# Altium PCB IO_Combo_V1_2PCB.PcbDoc (part 1 of 3)
Units mil, origin at the board's own origin, x right, y up, seen from the top; angles counter-clockwise.
Board outline 5600 x 4000 mil, 4 copper layers (Top Layer, Plane_Gnd, Plane_Power, Bottom Layer), stack 23.756 mil thick; 126 components, 208 nets, 710 pads, 196 vias.
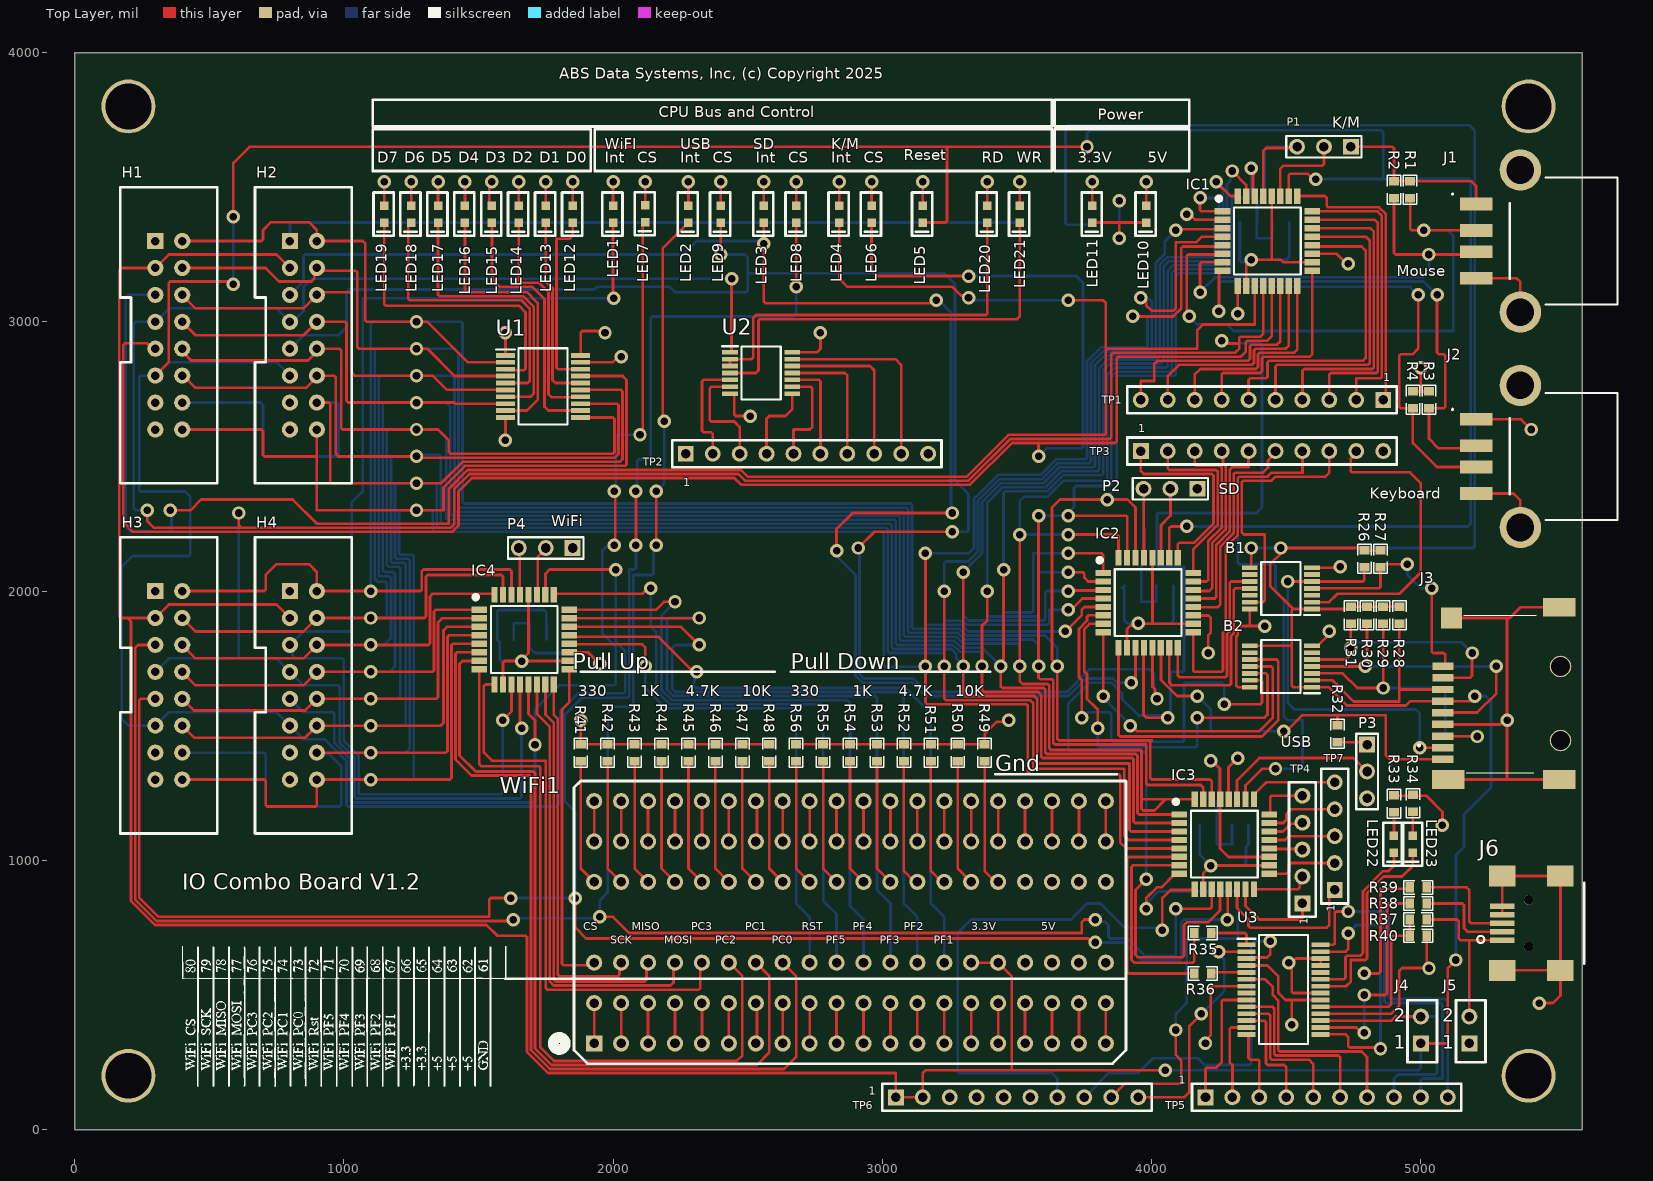
[diagram p0: Top Layer view]
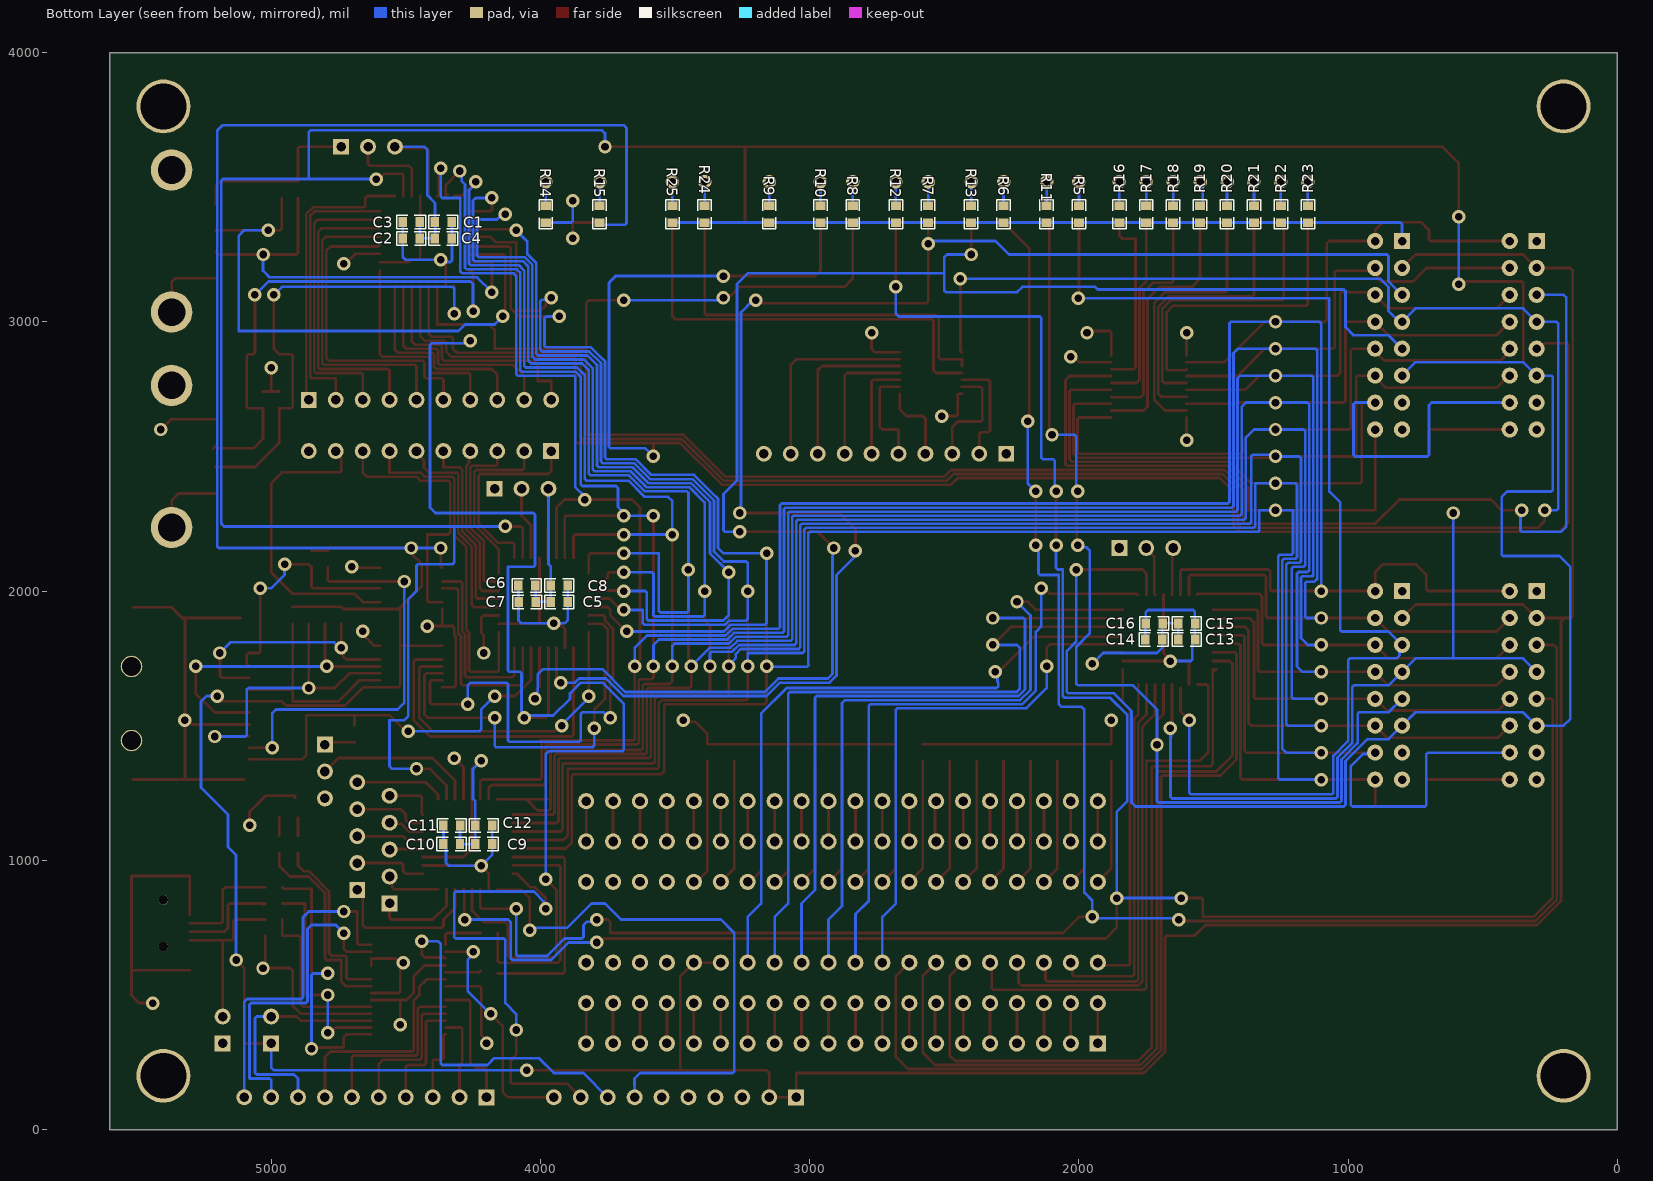
[diagram p1: Bottom Layer view, seen from below]
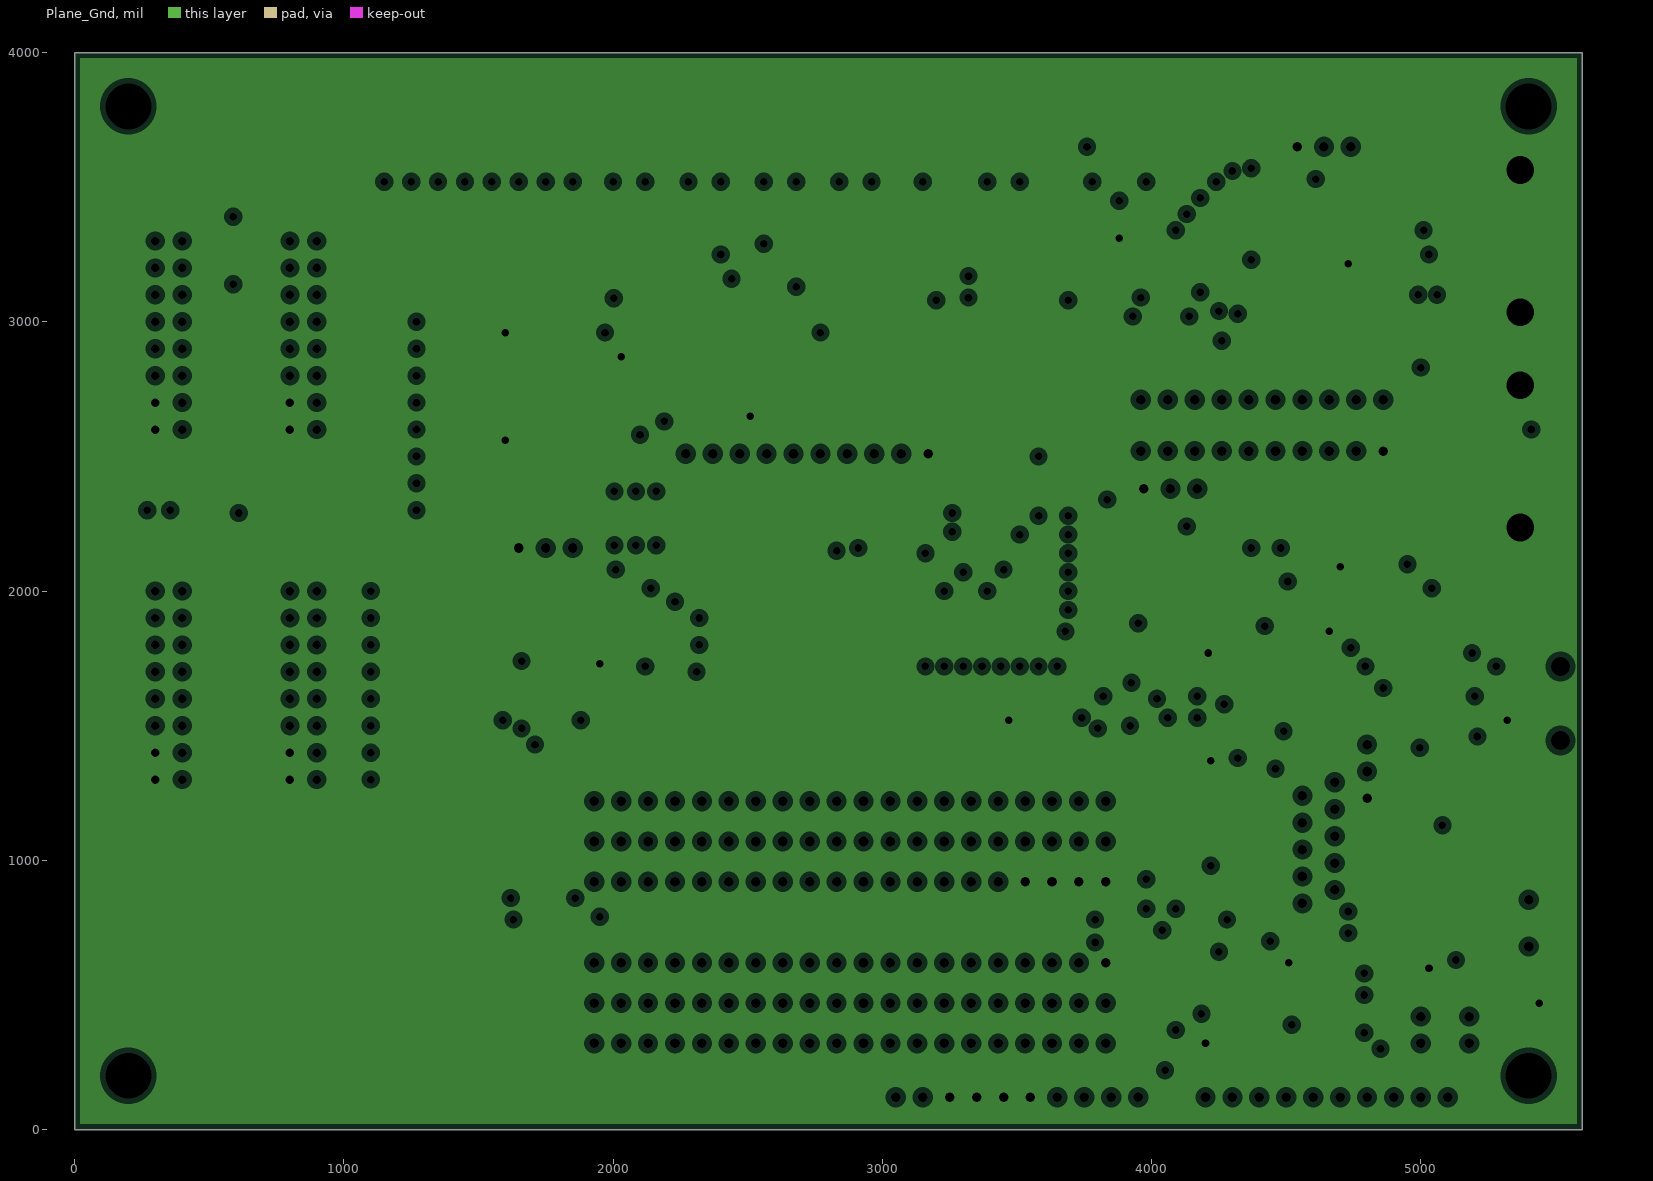
[diagram p2: Plane_Gnd, clearances drawn from the general rule]
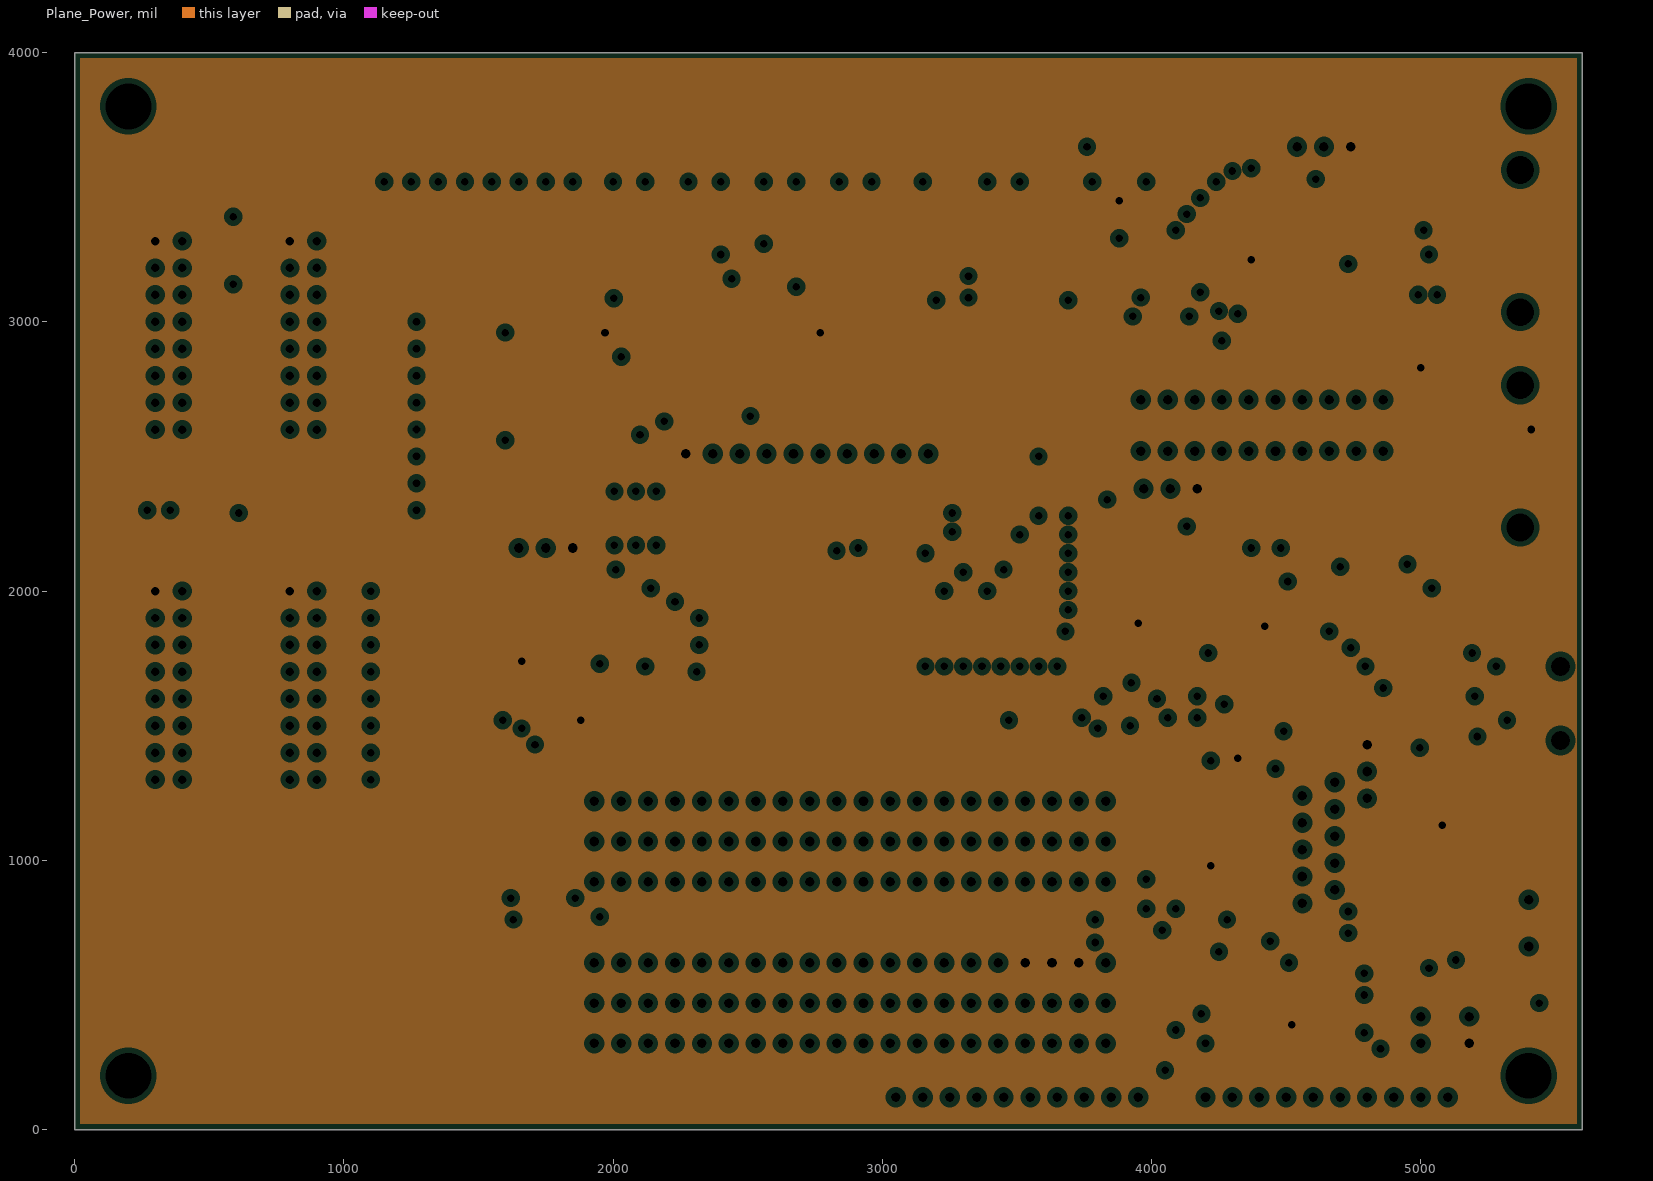
[diagram p3: Plane_Power, clearances drawn from the general rule]
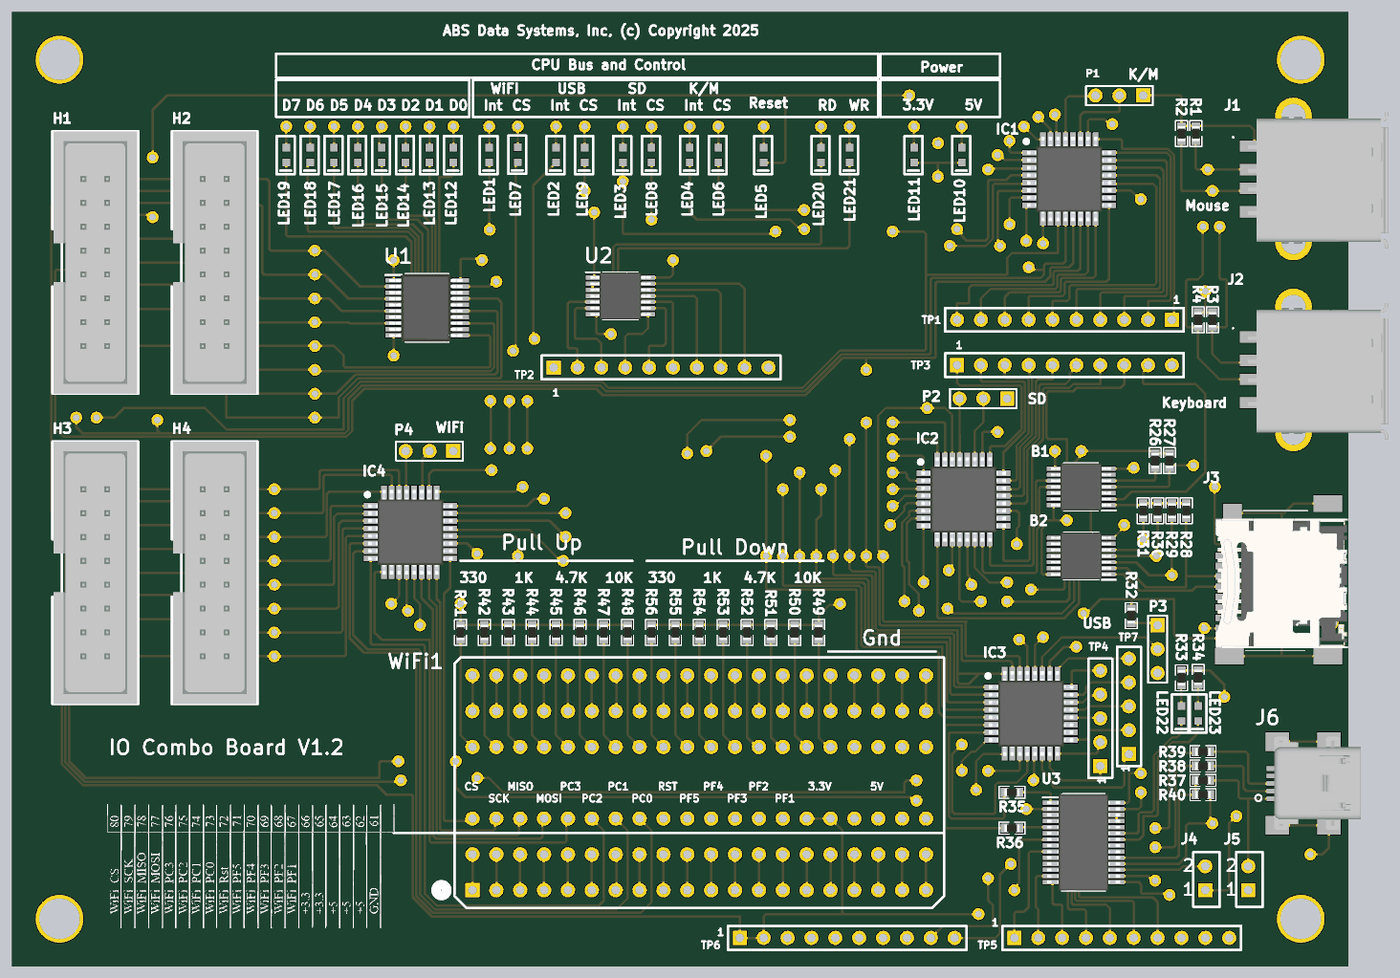
[diagram p5: 3D render of the assembled board from above, using the file's embedded part models]
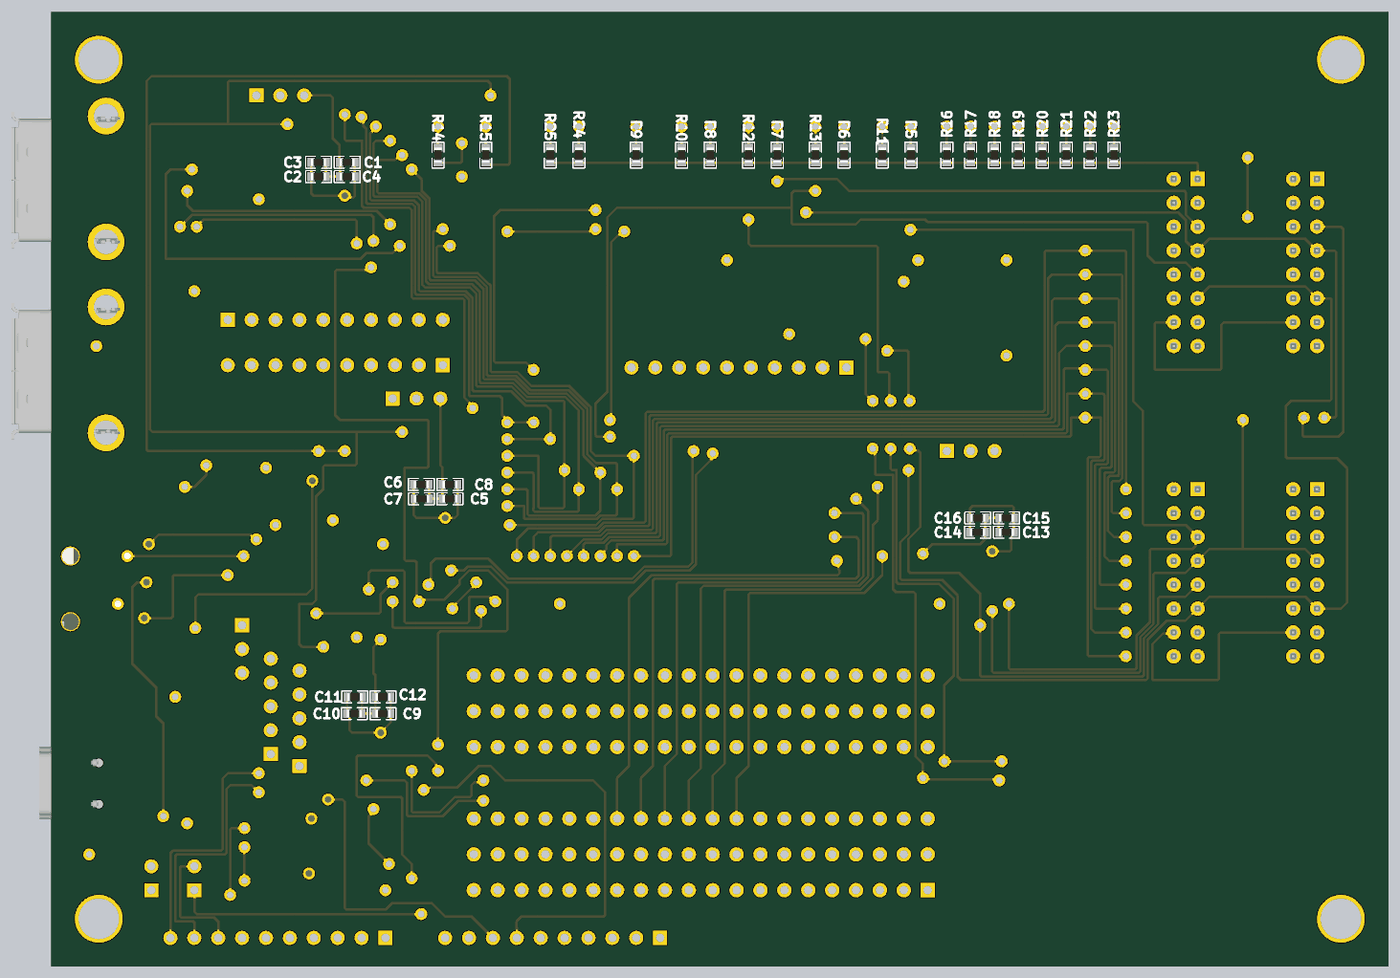
[diagram p6: 3D render of the assembled board from below, using the file's embedded part models]

## Layer stack, top to bottom
Top Solder: solder mask 0.4, Solder Resist, Dk 3.5
Top Layer: signal copper 1.4
Dielectric 2: prepreg 2.8, PP-006, Dk 4.1
Plane_Gnd: plane copper 1.378, net GND
Dielectric 1: dielectric 12.6, FR-4, Dk 4.8
Plane_Power: plane copper 1.378, net +5
Dielectric 3: prepreg 2.8, PP-006, Dk 4.1
Bottom Layer: signal copper 1.4
Bottom Solder: solder mask 0.4, Solder Resist, Dk 3.5

## Board outline
0,0 0,4000 5600,4000 5600,0

## Design rules (kind name [scope] priority, off if disabled: settings)
Clearance [All] p1: gap=5 ignorepadtopadclearanceinfootprint=FALSE
HoleSize [All] p1: absolutevalues=TRUE maxlimit=200 minlimit=1 maxpercent=80.000 minpercent=20.000
HoleToHoleClearance [All] p1: gap=5 allowstackedmicrovias=TRUE
MinimumSolderMaskSliver [All] p1: minsoldermaskwidth=2
PlaneClearance [All] p1: clearance=20
PlaneConnect [All] p1: planeconnectstyle=Relief reliefexpansion=20 reliefentries=4 reliefconductorwidth=10 reliefairgap=10
PolygonConnect [All] p1: connectstyle=Relief reliefconductorwidth=10 reliefentries=4 polygonreliefangle="90 Angle" airgapwidth=10
RoutingVias [All] p1: holewidth=28 width=50 viastyle="Through Hole" minholewidth=28 minwidth=50 maxholewidth=28 maxwidth=50
SilkToSilkClearance [All] p1: silktosilkclearance=4
SilkToSolderMaskClearance [IsPad] p1: minsilkscreentomaskgap=3.5 clearancetoexposedcopper=TRUE
SolderMaskExpansion [All] p1: expansion=4 istentingtop=FALSE
Width [All] p1: maxlimit=40 minlimit=5 preferedwidth=10 minimp=50.000000 maximp=50.000000 favimp=50.000000
23 further rules are at their usual default settings.

## Classes and differential pairs
component class IO_Combo_WiFi: C13 C14 C15 C16 H4 IC4 P4 R41 R42 R43 R44 R45 R46 R47 R48 R49 R50 R51 R52 R53 R54 R55 R56 WiFi1
component class IO_Combo_USB_Serial: C9 C10 C11 C12 H3 IC3 J4 J5 J6 LED22 LED23 P3 R33 R34 R35 R36 R37 R38 R39 R40 TP4 TP5 TP6 TP7 U3
component class IO_Combo_SD: B1 B2 C5 C6 C7 C8 H2 IC2 J3 P2 R26 R27 R28 R29 R30 R31 R32 TP3
component class IO_Combo_LED_Monitor: LED1 LED2 LED3 LED4 LED5 LED6 LED7 LED8 LED9 LED10 LED11 LED12 LED13 LED14 LED15 LED16 LED17 LED18 LED19 LED20 LED21 R5 R6 R7 R8 R9 R10 R11 R12 R13 R14 R15 R16 R17 R18 R19 R20 R21 R22 R23 R24 R25 TP2 U1 U2
component class IO_Combo_Keyboard_Mouse: C1 C2 C3 C4 H1 IC1 J1 J2 P1 R1 R2 R3 R4 TP1

## Components (designator, comment, footprint, x,y, rotation, side; value= is the part's Value field where it differs from the comment)
B1 "TXB0104PWRG4" SOP65P640X120-14N 4480,2010 r180 top locked
B2 "TXB0104PWRG4" SOP65P640X120-14N 4480,1720 r180 top locked
C1 "100nf" 0603 4360,3370 r0 bottom locked
C2 "1uf" 0603 4480,3310 r180 bottom locked
C3 "100nf" 0603 4480,3370 r180 bottom locked
C4 "1uf" 0603 4360,3310 r0 bottom locked
C5 "100nf" 0603 3930,1960 r0 bottom
C6 "1uf" 0603 4050,2020 r180 bottom
C7 "100nf" 0603 4048.5,1960 r180 bottom
C8 "1uf" 0603 3930,2020 r0 bottom
C9 "100nf" 0603 4210,1060 r0 bottom locked
C10 "1uf" 0603 4330,1060 r180 bottom locked
C11 "100nf" 0603 4328.5,1130 r180 bottom locked
C12 "1uf" 0603 4210,1130 r0 bottom locked
C13 "100nf" 0603 1600,1820 r0 bottom
C14 "1uf" 0603 1721.5,1820 r180 bottom
C15 "100nf" 0603 1600,1880 r0 bottom
C16 "1uf" 0603 1720,1880 r180 bottom
H1 "Header_IDC_2x8" HEADER16 300,3300 r0 top locked
H2 "Header_IDC_2x8" HEADER16 800,3300 r0 top locked
H3 "Header_IDC_2x8" HEADER16 300,2000 r0 top locked
H4 "Header_IDC_2x8" HEADER16 800,2000 r0 top locked
IC1 "AVR64DD32-I_PT" QFP80P900X900X120-32N 4430,3300 r0 top locked
IC2 "AVR64DD32_SDCard" QFP80P900X900X120-32N 3987.24,1956.85 r0 top locked
IC3 "AVR64DD32-I_PT" QFP80P900X900X120-32N 4270,1060 r0 top locked
IC4 "AVR64DD32-I_PT" QFP80P900X900X120-32N 1670,1820 r0 top locked
J1 "USB87583_2579162" 87583-2579162 5700,3300 r90 top locked
J2 "USB87583_2579162" 87583-2579162 5700,2500 r90 top locked
J3 "SD Micro Card Socket - Amazon" SDMicroConnector 5300,1620 r270 top locked
J4 "Power Via USB" JUMPER 5000,320 r0 top
J5 "Power Via USB" JUMPER 5180,320 r0 top
J6 "USB Micro Connector" 1734035-2USB 5400,853.23 r180 top locked
LED1 "red" 0603_DIODE 2000,3400 r90 top locked
LED2 "red" 0603_DIODE 2280,3400 r90 top locked
LED3 "red" 0603_DIODE 2560,3400 r90 top locked
LED4 "red" 0603_DIODE 2840,3400 r90 top locked
LED5 "amber" 0603_DIODE 3150,3400 r90 top
LED6 "amber" 0603_DIODE 2960,3400 r90 top locked
LED7 "amber" 0603_DIODE 2120,3401.5 r90 top locked
LED8 "amber" 0603_DIODE 2680,3400 r90 top locked
LED9 "amber" 0603_DIODE 2400,3400 r90 top locked
LED10 "green" 0603_DIODE 3980,3400 r90 top
LED11 "blue" 0603_DIODE 3780,3400 r90 top
LED12 "green" 0603_DIODE 1850,3400 r90 top locked
LED13 "green" 0603_DIODE 1750,3400 r90 top locked
LED14 "green" 0603_DIODE 1650,3400 r90 top locked
LED15 "green" 0603_DIODE 1550,3400 r90 top locked
LED16 "green" 0603_DIODE 1450,3400 r90 top locked
LED17 "green" 0603_DIODE 1350,3400 r90 top locked
LED18 "green" 0603_DIODE 1250,3400 r90 top locked
LED19 "green" 0603_DIODE 1150,3400 r90 top locked
LED20 "green" 0603_DIODE 3390,3400 r90 top
LED21 "red" 0603_DIODE 3510,3400 r90 top
LED22 "green" 0603_DIODE 4900,1060 r90 top
LED23 "red" 0603_DIODE 4970,1060 r90 top
P1 "MHDR1X3_100" MHDR1X3_100 4740,3650 r180 top
P2 "MHDR1X3_100" MHDR1X3_100 4170,2380 r180 top locked
P3 "MHDR1X3_100" MHDR1X3_100 4800,1430 r270 top locked
P4 "MHDR1X3_100" MHDR1X3_100 1850,2160 r180 top
R1 "4.7k" 0603 4960,3490 r270 top
R2 "4.7k" 0603 4900,3490 r270 top
R3 "4.7k" 0603 5030,2710 r270 top
R4 "4.7k" 0603 4970,2710 r270 top
R5 "1k" 0603 2000,3400 r270 bottom locked
R6 "1k" 0603 2280,3400 r270 bottom locked
R7 "1k" 0603 2560,3400 r270 bottom locked
R8 "1k" 0603 2840,3400 r270 bottom locked
R9 "1k" 0603 3150,3400 r270 bottom locked
R10 "1k" 0603 2960,3400 r270 bottom locked
R11 "1k" 0603 2120,3400 r270 bottom locked
R12 "1k" 0603 2680,3400 r270 bottom locked
R13 "1k" 0603 2400,3400 r270 bottom locked
R14 "4.7k" 0603 3980,3400 r270 bottom locked
R15 "4.7k" 0603 3780,3400 r270 bottom locked
R16 "4.7k" 0603 1850,3400 r270 bottom locked
R17 "4.7k" 0603 1750,3400 r270 bottom locked
R18 "4.7k" 0603 1650,3400 r270 bottom locked
R19 "4.7k" 0603 1550,3400 r270 bottom locked
R20 "4.7k" 0603 1450,3400 r270 bottom locked
R21 "4.7k" 0603 1350,3400 r270 bottom locked
R22 "4.7k" 0603 1250,3400 r270 bottom locked
R23 "4.7k" 0603 1150,3400 r270 bottom locked
R24 "4.7k" 0603 3390,3400 r270 bottom locked
R25 "1k" 0603 3510,3400 r270 bottom locked
R26 "51K" 0603 4790,2120 r270 top
R27 "51K" 0603 4850,2120 r270 top
R28 "51K" 0603 4920,1910 r270 top
R29 "51K" 0603 4860,1910 r270 top
R30 "51K" 0603 4800,1910 r270 top
R31 "51K" 0603 4740,1910 r270 top
R32 "4.7k" 0603 4690,1470 r270 top
R33 "4.7k" 0603 4900,1210 r90 top
R34 "1k" 0603 4970,1211.5 r90 top
R35 "0R" 0603 4190,730 r0 top
R36 "0R" 0603 4190,580 r0 top
R37 "4.7k" 0603 4990,780 r0 top
R38 "0R" 0603 4990,840 r180 top
R39 "0R" 0603 4990,900 r180 top
R40 "10k" 0603 4990,720 r180 top
R41 "330" 0603 1880,1400 r270 top
R42 "330" 0603 1980,1400 r270 top
R43 "1k" 0603 2080,1400 r270 top
R44 "1k" 0603 2180,1400 r270 top
R45 "4.7k" 0603 2280,1400 r270 top
R46 "4.7k" 0603 2380,1400 r270 top
R47 "10k" 0603 2480,1400 r270 top
R48 "10k" 0603 2580,1400 r270 top
R49 "330" 0603 3380,1400 r90 top
R50 "330" 0603 3280,1400 r90 top
R51 "1k" 0603 3180,1400 r90 top
R52 "1k" 0603 3080,1400 r90 top
R53 "4.7k" 0603 2980,1400 r90 top
R54 "4.7k" 0603 2880,1400 r90 top
R55 "10k" 0603 2780,1400 r90 top
R56 "10k" 0603 2680,1400 r90 top
TP1 "TP_1X10" TP_1X10 4860,2710 r180 top
TP2 "TP_1X10" TP_1X10 2270,2510 r0 top locked
TP3 "TP_1X10" TP_1X10 3960,2520 r0 top locked
TP4 "TP_1_X_5" TP_1X5 4560,840 r90 top locked
TP5 "TP_1X10" TP_1X10 4200,120 r0 top locked
TP6 "TP_1X10" TP_1X10 3050,120 r0 top
TP7 "TP_1_X_5" TP_1X5 4680,890 r90 top locked
U1 "SN74ABT240ADBR" SOP65P780X200-20N 1740,2760 r0 top locked
U2 "SN74AC04PWR" SOP65P640X120-14N 2550,2810 r0 top locked
U3 "FT232RL-REEL" SOIC-28_NARROW 4490,520 r0 top locked
WiFi1 "WiFi_Universal" WIFI_UNIVERSAL 1930,320 r90 top locked

## Footprints (in the part's own frame and the unit in brackets; to place one, negate y for a bottom-side part, rotate by r counter-clockwise, add the part's x,y. Pads: shape width x height; smd on the part's side, far side on the other; paste and mask are expansions set on the pad)
0603 [mm]
  rect 0.8x0.95 smd: 1(-0.8,0) 2(0.8,0)
  silkscreen extent -1.37,-0.64 1.37,0.64, body extent -0.8,-0.4 0.8,0.4, height 0.55
0603_DIODE [mm]
  rect 0.8x0.8 smd: 1(-0.8,0) 2(0.8,0)
  silkscreen extent -2.03,-0.89 2.03,1.02
87583-2579162 [mm] "USB Female Connector"
  rect 1.2x3.048 smd: 1(3.5,12.573) 2(1,12.573) 3(-1,12.573) 4(-3.5,12.573)
  round 3.9 hole 2.6: MH1(6.7,8.4) MH4(-6.7,8.4)
  silkscreen extent -6,-0.76 6,14.86, body extent -7.38,-1.65 7.12,13.23, height 7.74
1734035-2USB [mm]
  rect 2.3x0.5 smd: 1(2.5,3.8) 2(2.5,3) 3(2.5,2.2) 4(2.5,1.4) 5(2.5,0.6)
  rect 2.5x2 smd: 6(2.5,-2.25) 7(-3,-2.25) 8(-3,6.65) 9(2.5,6.65)
  round 0.9 hole 0.9 unplated: 10(0,4.4) 11(0,0)
  silkscreen extent -5.25,-1.65 4.85,6.05, body extent -6.35,-2.79 2.85,7.11, height 4.17
HEADER16 [mil]
  rect 60x60 hole 31.5: 1(0,0)
  round 60 hole 31.5: 2(100,0) 3(0,-100) 4(100,-100) 5(0,-200) 6(100,-200) 7(0,-300) 8(100,-300) 9(0,-400) 10(100,-400) 11(0,-500) 12(100,-500) 13(0,-600) 14(100,-600) 15(0,-700) 16(100,-700)
  silkscreen extent -130,-900 230,200, body extent -125,-900 225,200, height 360
JUMPER [mm] "Connector; Header; 8x2 Position"
  rect 1.5x1.5 hole 0.9: 1(0,0)
  round 1.5 hole 0.9: 2(0,2.54)
  silkscreen extent -1.27,-1.78 1.52,4.06
MHDR1X3_100 [mm] "Connector; Header; 3 Position"
  rect 1.5x1.5 hole 0.9: 1(0,0)
  round 1.5 hole 0.9: 2(2.54,0) 3(5.08,0)
  silkscreen extent -1.02,-1.02 6.1,1.02
QFP80P900X900X120-32N [mm]
  rect 1.475x0.6 smd: 1(-4.238,2.8) 2(-4.238,2) 3(-4.238,1.2) 4(-4.238,0.4) 5(-4.238,-0.4) 6(-4.238,-1.2) 7(-4.238,-2) 8(-4.238,-2.8) 17(4.238,-2.8) 18(4.238,-2) 19(4.238,-1.2) 20(4.238,-0.4) 21(4.238,0.4) 22(4.238,1.2) 23(4.238,2) 24(4.238,2.8)
  rect 0.6x1.475 smd: 9(-2.8,-4.238) 10(-2,-4.238) 11(-1.2,-4.238) 12(-0.4,-4.238) 13(0.4,-4.238) 14(1.2,-4.238) 15(2,-4.238) 16(2.8,-4.238) 25(2.8,4.238) 26(2,4.238) 27(1.2,4.238) 28(0.4,4.238) 29(-0.4,4.238) 30(-1.2,4.238) 31(-2,4.238) 32(-2.8,4.238)
  silkscreen extent -4.77,-3.15 3.15,4.2, body extent -4.5,-4.5 4.5,4.5, height 1.2
SDMicroConnector [mm]
  rect 0.7x2 smd: 1(-2.571,-5.542) 2(-1.471,-5.542) 3(-0.371,-5.549) 4(0.729,-5.549) 5(1.829,-5.549) 6(2.929,-5.549) 7(4.029,-5.549) 8(5.129,-5.549) 9(6.223,-5.549)
  round 2.032 hole 1.778: H1(-2.54,5.55) H2(4.445,5.55)
  rect 2x2 smd: MP1(-7.112,-4.737)
  rect 1.778x3.048 smd: MP2(8.128,-5.049) MP3(-8.128,5.423) MP4(8.128,5.423)
  silkscreen extent -7.37,-7.9 7.49,3.26, body extent -9.62,-2.98 10.38,3.77, height 5.8
SOIC-28_NARROW [mm]
  rect 1.7x0.45 smd: 1(-3.5,4.225) 2(-3.5,3.575) 3(-3.5,2.925) 4(-3.5,2.275) 5(-3.5,1.625) 6(-3.5,0.975) 7(-3.5,0.325) 8(-3.5,-0.325) 9(-3.5,-0.975) 10(-3.5,-1.625) 11(-3.5,-2.275) 12(-3.5,-2.925) 13(-3.5,-3.575) 14(-3.5,-4.225) 15(3.5,-4.225) 16(3.5,-3.575) 17(3.5,-2.925) 18(3.5,-2.275) 19(3.5,-1.625) 20(3.5,-0.975) 21(3.5,-0.325) 22(3.5,0.325) 23(3.5,0.975) 24(3.5,1.625) 25(3.5,2.275) 26(3.5,2.925) 27(3.5,3.575) 28(3.5,4.225)
  silkscreen extent -4.35,-5.14 2.3,5.14, body extent -3.89,-5.14 3.89,5.14, height 2
SOP65P640X120-14N [mm]
  rect 1.475x0.45 smd: 1(-2.938,1.95) 2(-2.938,1.3) 3(-2.938,0.65) 4(-2.938,0) 5(-2.938,-0.65) 6(-2.938,-1.3) 7(-2.938,-1.95) 8(2.938,-1.95) 9(2.938,-1.3) 10(2.938,-0.65) 11(2.938,0) 12(2.938,0.65) 13(2.938,1.3) 14(2.938,1.95)
  silkscreen extent -3.67,-2.5 1.85,2.52, body extent -3.2,-2.5 3.2,2.5, height 1.13
SOP65P780X200-20N [mm]
  rect 1.8x0.45 smd: 1(-3.55,2.925) 2(-3.55,2.275) 3(-3.55,1.625) 4(-3.55,0.975) 5(-3.55,0.325) 6(-3.55,-0.325) 7(-3.55,-0.975) 8(-3.55,-1.625) 9(-3.55,-2.275) 10(-3.55,-2.925) 11(3.55,-2.925) 12(3.55,-2.275) 13(3.55,-1.625) 14(3.55,-0.975) 15(3.55,-0.325) 16(3.55,0.325) 17(3.55,0.975) 18(3.55,1.625) 19(3.55,2.275) 20(3.55,2.925)
  silkscreen extent -4.45,-3.6 2.3,3.6, body extent -4.03,-3.6 3.77,3.6, height 1.9
TP_1X5 [mm] "Test Point Header 1X10"
  rect 1.5x1.5 hole 0.9: 1(0,0)
  round 1.5 hole 0.9: 2(2.54,0) 3(5.08,0) 4(7.62,0) 5(10.16,0)
  silkscreen extent -1.27,-1.27 11.43,1.27
TP_1X10 [mm] "Test Point Header 1X10"
  rect 1.5x1.5 hole 0.9: 1(0,0)
  round 1.5 hole 0.9: 2(2.54,0) 3(5.08,0) 4(7.62,0) 5(10.16,0) 6(12.7,0) 7(15.24,0) 8(17.78,0) 9(20.32,0) 10(22.86,0)
  silkscreen extent -1.27,-1.27 24.13,1.27
WIFI_UNIVERSAL [mil]
  rect 60x60 hole 35.43: 1(0,0)
  round 60 hole 35.43: 2(0,-100) 3(0,-200) 4(0,-300) 5(0,-400) 6(0,-500) 7(0,-600) 8(0,-700) 9(0,-800) 10(0,-900) 11(0,-1000) 12(0,-1100) 13(0,-1200) 14(0,-1300) 15(0,-1400) 16(0,-1500) 17(0,-1600) 18(0,-1700) 19(0,-1800) 20(0,-1900) 21(900,-1900) 22(900,-1800) 23(900,-1700) 24(900,-1600) 25(900,-1500) 26(900,-1400) 27(900,-1300) 28(900,-1200) 29(900,-1100) 30(900,-1000) 31(900,-900) 32(900,-800) 33(900,-700) 34(900,-600) 35(900,-500) 36(900,-400) 37(900,-300) 38(900,-200) 39(900,-100) 40(900,0) 41(150,0) 42(150,-100) 43(150,-200) 44(150,-300) 45(150,-400) 46(150,-500) 47(150,-600) 48(150,-700) 49(150,-800) 50(150,-900) 51(150,-1000) 52(150,-1100) 53(150,-1200) 54(150,-1300) 55(150,-1400) 56(150,-1500) 57(150,-1600) 58(150,-1700) 59(150,-1800) 60(150,-1900) 61(300,-1900) 62(300,-1800) 63(300,-1700) 64(300,-1600) 65(300,-1500) 66(300,-1400) 67(300,-1300) 68(300,-1200) 69(300,-1100) 70(300,-1000) 71(300,-900) 72(300,-800) 73(300,-700) 74(300,-600) 75(300,-500) 76(300,-400) 77(300,-300) 78(300,-200) 79(300,-100) 80(300,0) 81(600,-1900) 82(600,-1800) 83(600,-1700) 84(600,-1600) 85(600,-1500) 86(600,-1400) 87(600,-1300) 88(600,-1200) 89(600,-1100) 90(600,-1000) 91(600,-900) 92(600,-800) 93(600,-700) 94(600,-600) 95(600,-500) 96(600,-400) 97(600,-300) 98(600,-200) 99(600,-100) 100(600,0) 101(750,-1900) 102(750,-1800) 103(750,-1700) 104(750,-1600) 105(750,-1500) 106(750,-1400) 107(750,-1300) 108(750,-1200) 109(750,-1100) 110(750,-1000) 111(750,-900) 112(750,-800) 113(750,-700) 114(750,-600) 115(750,-500) 116(750,-400) 117(750,-300) 118(750,-200) 119(750,-100) 120(750,0)
  silkscreen extent -75,-1975 975,152

## Part data
B1 B2: "Texas Instruments TXB0104PWRG4, Voltage Level Translator, 3-State, 1.2  3.6 V, 1.65  5.5 V, 14-Pin TSSOP", Manufacturer_Name="Texas Instruments", Mouser Part Number=595-TXB0104PWRG4, Datasheet Link=https://datasheet.datasheetarchive.com/originals/distributors/SFDatasheet-6/sf-000131436.pdf, Geometry.Height=1.2mm, Manufacturer_Part_Number=TXB0104PWRG4, Mouser Price/Stock=https://www.mouser.co.uk/ProductDetail/Texas-Instruments/TXB0104PWRG4?qs=oFXvjAmG9EjoQ0gyZ%252BZWbg%3D%3D
C1 C3 C5 C7 C9 C11 C13 C15: library part CL10B104JB8NNNC, "Samsung Electro-Mechanics 0603 100nf"
C2 C4 C6 C8 C10 C12 C14 C16: library part CL10B105KA8NNNL, "Samsung Electro-Mechanics 0603 1uf"
H1 H2 H3 H4: "16 Pin 2x8 Through Hold IDC Connector", Color=Black, Manufacturer=Samtec, Manufacturer Part Number=TST-108-01-G-D, Max Operating Temperature=125°C, Min Operating Temperature=-55°C, Supplier Part Number 1=SAM10835-ND, Category="Headers and Wire Housings", ComponentLink1Description=https://datasheet.ciiva.com/739/tst-mkt-739845.pdf?src-supplier=Digi-Key, ComponentLink1URL=https://datasheet.ciiva.com/739/tst-mkt-739845.pdf?src-supplier=Digi-Key, ComponentLink2Description=https://datasheet.ciiva.com/10018/htst-10018510.pdf?src-supplier=Avnet, ComponentLink2URL=https://datasheet.ciiva.com/10018/htst-10018510.pdf?src-supplier=Avnet, Connector Type="Male Pin", Contact Material=Bronze, Contact Mating Length=0.25inch, Contact Plating=Gold, Depth=9.27mm, Gender=Male, Housing Color=Black, Housing Material=Polyester, Length=27.94mm, Mount="Through Hole", Number of Contacts=16, Number of Positions=16, Number of Rows=2, Orientation=Straight, Packaging=Rail/Tube, Pitch=2.54mm, Pricing 1="1=2.85000, 10=2.73600, 100=2.28000, 500=1.93800, 1000=1.65300, 5000=1.48200 (USD)", REACH SVHC="No SVHC", RoHS=Yes, Row Spacing=0.1inch, Stock 1=227, Supplier 1=Digi-Key, Termination=Solder
IC1 IC2 IC3 IC4: "Integrated Circuit", Manufacturer_Name=Microchip, Manufacturer_Part_Number="AVR64DD32-I/PT | MULTI-VOLTAGE I/O", Datasheet Link=https://www.microchip.com/en-us/product/AVR64DD32, Height=1.2mm
J1 J2: "USB Connectors USB A Plug, SMT, R/A, GF, With Kinked shell stakes and posts, T&R", Manufacturer_Name="GCT (GLOBAL CONNECTOR TECHNOLOGY)", Manufacturer_Part_Number=USB1061-GF-L-A, Mouser Part Number=640-USB1061-GF-L-A, Datasheet Link=https://gct.co/connector/usb1061, Geometry.Height=4.6mm, Mouser Price/Stock=https://www.mouser.co.uk/ProductDetail/GCT/USB1061-GF-L-A?qs=KUoIvG%2F9IlYSthVIrIBVzQ%3D%3D
J3: library part SD_Micro_Socket, "Memory Card Connectors 9P R/A SMT MICRO SD HINGE PUSH-PULL", Manufacturer_Name=Hirose, Manufacturer_Part_Number=DM3CS-SF, Mouser Part Number=798-DM3CSSF, Datasheet Link=https://datasheet.lcsc.com/szlcsc/Hirose-HRS-DM3CS-SF_C202111.pdf, Geometry.Height=1.83mm, Mouser Price/Stock=https://www.mouser.co.uk/ProductDetail/Hirose-Connector/DM3CS-SF?qs=tTj%252BmQ3KZwbB9K5zh89Rcw%3D%3D
J4 J5: library part Jumper, "16 Pin 3x8 Through Hold Jumprts", Color=Black, Manufacturer=Samtec, Manufacturer Part Number=TST-108-01-G-D, Max Operating Temperature=125°C, Min Operating Temperature=-55°C, Category="Headers and Wire Housings", ComponentLink1Description=https://datasheet.ciiva.com/739/tst-mkt-739845.pdf?src-supplier=Digi-Key, ComponentLink1URL=https://datasheet.ciiva.com/739/tst-mkt-739845.pdf?src-supplier=Digi-Key, ComponentLink2Description=https://datasheet.ciiva.com/10018/htst-10018510.pdf?src-supplier=Avnet, ComponentLink2URL=https://datasheet.ciiva.com/10018/htst-10018510.pdf?src-supplier=Avnet, Connector Type="Male Pin", Contact Material=Bronze, Contact Mating Length=0.25inch, Contact Plating=Gold, Depth=9.27mm, Gender=Male, Housing Color=Black, Housing Material=Polyester, Length=27.94mm, Mount="Through Hole", Number of Contacts=16, Number of Positions=16, Number of Rows=2, Orientation=Straight, Packaging=Rail/Tube, Pitch=2.54mm, Pricing 1="1=2.85000, 10=2.73600, 100=2.28000, 500=1.93800, 1000=1.65300, 5000=1.48200 (USD)", REACH SVHC="No SVHC", RoHS=Yes, Row Spacing=0.1inch, Stock 1=227, Supplier 1=Digi-Key, Termination=Solder
J6: library part 1734035-4, "USB Micro Connector SMD", Manufacturer_Name="TE Connectivity", Mouser2 Part Number=571-1734035-4, Datasheet Link=https://componentsearchengine.com//1734035-4.pdf, Manufacturer_Part_Number=1734035-4, Mouser2 Price/Stock=https://www.mouser.com/Search/Refine.aspx?Keyword=571-1734035-4
LED1 LED2 LED3 LED4 LED21 LED23: library part 150060RS75000, "Wurth Elektronik 0603 red", Case Code (Imperial)=0603, Case Code (Metric)=1608, Color=Green, Forward Current=30mA, Forward Voltage=3.2V, Manufacturer="Wurth Electronics", Manufacturer Part Number=150060GS75000, Max Operating Temperature=85°C, Min Operating Temperature=-40°C, Package Quantity=4000, Test Current=20mA, Case/Package=0603, Category=LEDs, ComponentLink1Description=https://datasheet.ciiva.com/29562/150060gs75000-29562868.pdf?src-supplier=Digi-Key, ComponentLink1URL=https://datasheet.ciiva.com/29562/150060gs75000-29562868.pdf?src-supplier=Digi-Key, ComponentLink2Description=https://datasheet.ciiva.com/29279/759427-da-01-en-chipled-0603-w-kl-gruen-150060gs75000-29279201.pdf?src-supplier=Conrad, ComponentLink2URL=https://datasheet.ciiva.com/29279/759427-da-01-en-chipled-0603-w-kl-gruen-150060gs75000-29279201.pdf?src-supplier=Conrad, ComponentLink3Description=https://datasheet.ciiva.com/29562/150060gs75000-29562869.pdf?src-supplier=Digi-Key, ComponentLink3URL=https://datasheet.ciiva.com/29562/150060gs75000-29562869.pdf?src-supplier=Digi-Key, ComponentLink4Description=https://datasheet.ciiva.com/29562/150060gs75000-29562870.pdf?src-supplier=Digi-Key, ComponentLink4URL=https://datasheet.ciiva.com/29562/150060gs75000-29562870.pdf?src-supplier=Digi-Key, Dominant Wavelength=520nm, Height=0.7mm, Lead Free="Lead Free", Length=1.6mm, Lens Style=Clear,Rectangular, Luminous Intensity=430mcd, Mount="Surface Mount", Packaging="Tape and Reel", Pricing 1="1=0.14000, 50=0.13300, 100=0.11400, 500=0.09900 (USD)", REACH SVHC=Unknown, RoHS=Yes, Stock 1=71509, Supplier 1=Digi-Key, Viewing Angle=140°, Wavelength=520nm, Width=0.8mm
LED5 LED6 LED7 LED8 LED9: library part 150060AS75000, "Wurth Elektronik 0603 amber", Case Code (Imperial)=0603, Case Code (Metric)=1608, Color=Green, Forward Current=30mA, Forward Voltage=3.2V, Manufacturer="Wurth Electronics", Manufacturer Part Number=150060GS75000, Max Operating Temperature=85°C, Min Operating Temperature=-40°C, Package Quantity=4000, Test Current=20mA, Case/Package=0603, Category=LEDs, ComponentLink1Description=https://datasheet.ciiva.com/29562/150060gs75000-29562868.pdf?src-supplier=Digi-Key, ComponentLink1URL=https://datasheet.ciiva.com/29562/150060gs75000-29562868.pdf?src-supplier=Digi-Key, ComponentLink2Description=https://datasheet.ciiva.com/29279/759427-da-01-en-chipled-0603-w-kl-gruen-150060gs75000-29279201.pdf?src-supplier=Conrad, ComponentLink2URL=https://datasheet.ciiva.com/29279/759427-da-01-en-chipled-0603-w-kl-gruen-150060gs75000-29279201.pdf?src-supplier=Conrad, ComponentLink3Description=https://datasheet.ciiva.com/29562/150060gs75000-29562869.pdf?src-supplier=Digi-Key, ComponentLink3URL=https://datasheet.ciiva.com/29562/150060gs75000-29562869.pdf?src-supplier=Digi-Key, ComponentLink4Description=https://datasheet.ciiva.com/29562/150060gs75000-29562870.pdf?src-supplier=Digi-Key, ComponentLink4URL=https://datasheet.ciiva.com/29562/150060gs75000-29562870.pdf?src-supplier=Digi-Key, Dominant Wavelength=520nm, Height=0.7mm, Lead Free="Lead Free", Length=1.6mm, Lens Style=Clear,Rectangular, Luminous Intensity=430mcd, Mount="Surface Mount", Packaging="Tape and Reel", Pricing 1="1=0.14000, 50=0.13300, 100=0.11400, 500=0.09900 (USD)", REACH SVHC=Unknown, RoHS=Yes, Stock 1=71509, Supplier 1=Digi-Key, Viewing Angle=140°, Wavelength=520nm, Width=0.8mm
LED10 LED12 LED13 LED14 LED15 LED16 LED17 LED18 LED19 LED20 LED22: library part 150060GS75000, "Wurth Elektronik 0603 green", Case Code (Imperial)=0603, Case Code (Metric)=1608, Color=Green, Forward Current=30mA, Forward Voltage=3.2V, Manufacturer="Wurth Electronics", Max Operating Temperature=85°C, Min Operating Temperature=-40°C, Package Quantity=4000, Test Current=20mA, Case/Package=0603, Category=LEDs, ComponentLink1Description=https://datasheet.ciiva.com/29562/150060gs75000-29562868.pdf?src-supplier=Digi-Key, ComponentLink1URL=https://datasheet.ciiva.com/29562/150060gs75000-29562868.pdf?src-supplier=Digi-Key, ComponentLink2Description=https://datasheet.ciiva.com/29279/759427-da-01-en-chipled-0603-w-kl-gruen-150060gs75000-29279201.pdf?src-supplier=Conrad, ComponentLink2URL=https://datasheet.ciiva.com/29279/759427-da-01-en-chipled-0603-w-kl-gruen-150060gs75000-29279201.pdf?src-supplier=Conrad, ComponentLink3Description=https://datasheet.ciiva.com/29562/150060gs75000-29562869.pdf?src-supplier=Digi-Key, ComponentLink3URL=https://datasheet.ciiva.com/29562/150060gs75000-29562869.pdf?src-supplier=Digi-Key, ComponentLink4Description=https://datasheet.ciiva.com/29562/150060gs75000-29562870.pdf?src-supplier=Digi-Key, ComponentLink4URL=https://datasheet.ciiva.com/29562/150060gs75000-29562870.pdf?src-supplier=Digi-Key, Dominant Wavelength=520nm, Height=0.7mm, Lead Free="Lead Free", Length=1.6mm, Lens Style=Clear,Rectangular, Luminous Intensity=430mcd, Manufacturer Part Number=150060GS75000, Mount="Surface Mount", Packaging="Tape and Reel", Pricing 1="1=0.14000, 50=0.13300, 100=0.11400, 500=0.09900 (USD)", REACH SVHC=Unknown, RoHS=Yes, Stock 1=71509, Supplier 1=Digi-Key, Viewing Angle=140°, Wavelength=520nm, Width=0.8mm
LED11: library part 150060BS75000, "Wurth Elektronik 0603 blue", Case Code (Imperial)=0603, Case Code (Metric)=1608, Color=Green, Forward Current=30mA, Forward Voltage=3.2V, Manufacturer="Wurth Electronics", Manufacturer Part Number=150060GS75000, Max Operating Temperature=85°C, Min Operating Temperature=-40°C, Package Quantity=4000, Test Current=20mA, Case/Package=0603, Category=LEDs, ComponentLink1Description=https://datasheet.ciiva.com/29562/150060gs75000-29562868.pdf?src-supplier=Digi-Key, ComponentLink1URL=https://datasheet.ciiva.com/29562/150060gs75000-29562868.pdf?src-supplier=Digi-Key, ComponentLink2Description=https://datasheet.ciiva.com/29279/759427-da-01-en-chipled-0603-w-kl-gruen-150060gs75000-29279201.pdf?src-supplier=Conrad, ComponentLink2URL=https://datasheet.ciiva.com/29279/759427-da-01-en-chipled-0603-w-kl-gruen-150060gs75000-29279201.pdf?src-supplier=Conrad, ComponentLink3Description=https://datasheet.ciiva.com/29562/150060gs75000-29562869.pdf?src-supplier=Digi-Key, ComponentLink3URL=https://datasheet.ciiva.com/29562/150060gs75000-29562869.pdf?src-supplier=Digi-Key, ComponentLink4Description=https://datasheet.ciiva.com/29562/150060gs75000-29562870.pdf?src-supplier=Digi-Key, ComponentLink4URL=https://datasheet.ciiva.com/29562/150060gs75000-29562870.pdf?src-supplier=Digi-Key, Dominant Wavelength=520nm, Height=0.7mm, Lead Free="Lead Free", Length=1.6mm, Lens Style=Clear,Rectangular, Luminous Intensity=430mcd, Mount="Surface Mount", Packaging="Tape and Reel", Pricing 1="1=0.14000, 50=0.13300, 100=0.11400, 500=0.09900 (USD)", REACH SVHC=Unknown, RoHS=Yes, Stock 1=71509, Supplier 1=Digi-Key, Viewing Angle=140°, Wavelength=520nm, Width=0.8mm
P1 P2 P3 P4: "Header, 3-Pin", LatestRevisionDate=17-Jul-2002, LatestRevisionNote="Re-released for DXP Platform.", Publisher="Altium Limited"
R1 R2 R3 R4 R14 R15 R16 R17 R18 R19 R20 R21 R22 R23 R24 R32 R33 R37 R45 R46 R53 R54: library part RC0603FR-104K7L, "YAGEO 0603 4.7k", Manufacturer_Name=KEMET, Manufacturer_Part_Number=RC0603JR-070RL, Mouser Part Number=603-RC0603JR-070RL, Datasheet Link=https://datasheet.datasheetarchive.com/originals/distributors/Datasheets_SAMA/902f9e387b938f871d31120f5fc1d65e.pdf, Geometry.Height=0.55mm, Mouser Price/Stock=https://www.mouser.co.uk/ProductDetail/YAGEO/RC0603JR-070RL?qs=2cAdsCoAWRGWyPcuXgGiXQ%3D%3D
R5 R6 R7 R8 R9 R10 R11 R12 R13 R25 R34 R43 R44 R51 R52: library part AC0603FR-7W1KL_1, "YAGEO 0603 1k ohm", Manufacturer_Name=KEMET, Manufacturer_Part_Number=RC0603JR-070RL, Mouser Part Number=603-RC0603JR-070RL, Datasheet Link=https://datasheet.datasheetarchive.com/originals/distributors/Datasheets_SAMA/902f9e387b938f871d31120f5fc1d65e.pdf, Geometry.Height=0.55mm, Mouser Price/Stock=https://www.mouser.co.uk/ProductDetail/YAGEO/RC0603JR-070RL?qs=2cAdsCoAWRGWyPcuXgGiXQ%3D%3D
R26 R27 R28 R29 R30 R31: library part RC0603FR-1051KL, "YAGEO 0603 51K", Manufacturer_Name=KEMET, Manufacturer_Part_Number=RC0603JR-070RL, Mouser Part Number=603-RC0603JR-070RL, Datasheet Link=https://datasheet.datasheetarchive.com/originals/distributors/Datasheets_SAMA/902f9e387b938f871d31120f5fc1d65e.pdf, Geometry.Height=0.55mm, Mouser Price/Stock=https://www.mouser.co.uk/ProductDetail/YAGEO/RC0603JR-070RL?qs=2cAdsCoAWRGWyPcuXgGiXQ%3D%3D
R35 R36 R38 R39: library part RC0603JR-070RL, "YAGEO 0603 0 ohm", Manufacturer_Name=KEMET, Mouser Part Number=603-RC0603JR-070RL, Datasheet Link=https://datasheet.datasheetarchive.com/originals/distributors/Datasheets_SAMA/902f9e387b938f871d31120f5fc1d65e.pdf, Geometry.Height=0.55mm, Manufacturer_Part_Number=RC0603JR-070RL, Mouser Price/Stock=https://www.mouser.co.uk/ProductDetail/YAGEO/RC0603JR-070RL?qs=2cAdsCoAWRGWyPcuXgGiXQ%3D%3D
R40 R47 R48 R55 R56: library part RC0603JR-0710KL, "YAGEO 0603 10k ohm", Manufacturer_Name=KEMET, Manufacturer_Part_Number=RC0603JR-070RL, Mouser Part Number=603-RC0603JR-070RL, Datasheet Link=https://datasheet.datasheetarchive.com/originals/distributors/Datasheets_SAMA/902f9e387b938f871d31120f5fc1d65e.pdf, Geometry.Height=0.55mm, Mouser Price/Stock=https://www.mouser.co.uk/ProductDetail/YAGEO/RC0603JR-070RL?qs=2cAdsCoAWRGWyPcuXgGiXQ%3D%3D
R41 R42 R49 R50: library part AC0603FR-10330RL, "YAGEO 0603 330 ohm", Manufacturer_Name=KEMET, Manufacturer_Part_Number=RC0603JR-070RL, Mouser Part Number=603-RC0603JR-070RL, Datasheet Link=https://datasheet.datasheetarchive.com/originals/distributors/Datasheets_SAMA/902f9e387b938f871d31120f5fc1d65e.pdf, Geometry.Height=0.55mm, Mouser Price/Stock=https://www.mouser.co.uk/ProductDetail/YAGEO/RC0603JR-070RL?qs=2cAdsCoAWRGWyPcuXgGiXQ%3D%3D
TP1 TP2 TP3 TP4 TP5 TP6 TP7: Color=Black, Manufacturer=Samtec, Manufacturer Part Number=TST-105-01-G-D, Max Operating Temperature=125°C, Min Operating Temperature=-55°C, Category="Headers and Wire Housings", ComponentLink1Description=https://datasheet.ciiva.com/739/tst-mkt-739845.pdf?src-supplier=Digi-Key, ComponentLink1URL=https://datasheet.ciiva.com/739/tst-mkt-739845.pdf?src-supplier=Digi-Key, ComponentLink2Description=https://datasheet.ciiva.com/10018/htst-10018510.pdf?src-supplier=Avnet, ComponentLink2URL=https://datasheet.ciiva.com/10018/htst-10018510.pdf?src-supplier=Avnet, Connector Type="Male Pin", Contact Material=Bronze, Contact Mating Length=0.25inch, Contact Plating=Gold, Depth=9.27mm, Gender=Male, Housing Color=Black, Housing Material=Polyester, Length=27.94mm, Mount="Through Hole", Number of Contacts=16, Number of Positions=16, Number of Rows=2, Orientation=Straight, Packaging=Rail/Tube, Pitch=2.54mm, Pricing 1="1=2.85000, 10=2.73600, 100=2.28000, 500=1.93800, 1000=1.65300, 5000=1.48200 (USD)", REACH SVHC="No SVHC", RoHS=Yes, Row Spacing=0.1inch, Stock 1=227, Supplier 1=Digi-Key, Termination=Solder
U1: "Octal Buffers/Drivers With 3-State Outputs", Manufacturer_Name="Texas Instruments", Mouser Part Number=595-SN74ABT240ADBR, Datasheet Link=http://www.ti.com/lit/gpn/sn74abt240a, Geometry.Height=2mm, Manufacturer_Part_Number=SN74ABT240ADBR, Mouser Price/Stock=https://www.mouser.co.uk/ProductDetail/Texas-Instruments/SN74ABT240ADBR?qs=JHHQeKcAU3Dt82k%252BVyiYdw%3D%3D
U2: "Hex Inverters", Manufacturer_Name="Texas Instruments", Mouser Part Number=595-SN74AC04PWR, Datasheet Link=http://www.ti.com/lit/gpn/sn74ac04, Geometry.Height=1.2mm, Manufacturer_Part_Number=SN74AC04PWR, Mouser Price/Stock=https://www.mouser.co.uk/ProductDetail/Texas-Instruments/SN74AC04PWR?qs=RZS%252BpEsUn7pRvPNqsga4SA%3D%3D
U3: "USB-Serial SMD", Manufacturer_Name="FTDI Chip", Datasheet Link=http://www.ftdichip.com/Support/Documents/DataSheets/ICs/DS_FT232R.pdf, Height=2mm, Manufacturer_Part_Number=FT232RL-REEL

## Free pads (board coordinates)
  round 200 hole 170: 37(200,200) 37(200,3800) 37(5400,200) 37(5400,3800)

## Via types
v1: diameter 50, hole 28, Top Layer to Bottom Layer, 196 vias

## Nets (pads, with @x,y where several pads share a name; then routed paths per layer and width w, separated by ;. In a path a pad name is that pad's centre, name@x,y a point inside that pad or via, vN(x,y) a via of type N, cw(c..) or ccw(c..) an arc to the next point about the centre after c; other vN are vias at no path point)
3v3Out: J4.2 TP5.8 U3.17 | length 882.3
  Top Layer w10: U3.17@4627.8,404.84 4890,404.84 4905.16,420 J4.2@5000,420
  Bottom Layer w10: TP5.8@4900,120 4900,189.14 4915.86,205 5054.14,205 5060,210.86 5060,414.14 5054.14,420 J4.2@5000,420
+3.3: B1.1 B1.8 B2.1 B2.8 H1.3 H2.3 H3.3 H4.3 J3.4 J4.1 R15.2 R26.1 R27.1 R28.1 R29.1 R30.1 R31.1 TP6.1 TP6.2 WiFi1.65 WiFi1.66 | length 17969.5
  Top Layer w10: H4.3@800,1900 750,1950 350,1950 H3.3@300,1900 201.21,1900 ; H2.3@800,3200 750,3250 350,3250 H1.3@300,3200 175.86,3200 166.37,3190.51 166.37,1905.86 172.23,1900 201.21,1900 ; WiFi1.66@3330,620 WiFi1.65@3430,620 3480,570 3480,225.86 3485.86,220 ; v1(4050,220) 3485.86,220 ; B2.8@4364.33,1796.77 4516.77,1796.77 4520,1800 ; B1.8@4364.33,2086.77 4366.14,2086.77 4370,2090.63 v1(4370,2160) ; R26.1@4790,2150 4848.5,2150 R27.1@4850,2151.5 ; R26.1@4790,2151.5 4781.5,2160 v1(4480,2160) 4480,2140 4440,2100 4440,2019.09 4525.86,1933.23 ; R28.1@4921.5,1940 R28.1@4920,1941.5 R29.1@4860,1941.5 R30.1@4800,1941.5 R31.1@4740,1941.5 4731.73,1933.23 B1.1@4595.67,1933.23 4525.86,1933.23 ; J4.1@5000,320 5094.14,320 5100,325.86 5100,600 v1(5130,630) ; v1(5200,1610) 5181.31,1591.31 J3.4@5081.52,1591.31 4961.31,1591.31 4945,1575 4725,1575 4656.77,1643.23 B2.1@4595.67,1643.23 4525.86,1643.23 4520,1649.09 4520,1800 ; 201.21,1900 201.21,1895.86 210,1887.07 210,848.79 298.79,760 1530,760 1570,720 1674.14,720 1680,714.14 1680,288.79 1758.79,210 3050,210 TP6.1@3050,120 TP6.2@3150,120 3150,210 3160,220 3485.86,220 ; 4520,1800 4520,1927.37 4525.86,1933.23
  Bottom Layer w10: R15.2@3780,3368.5 3771.5,3360 3685.86,3360 3680,3365.86 3680,3720 3690,3730 5180,3730 5200,3710 5200,2165.86 5194.14,2160 v1(4480,2160) v1(4370,2160) ; v1(4050,220) 4990,220 5000,230 J4.1@5000,320 ; v1(5130,630) 5130,1020 5160,1050 5160,1170 5260,1270 5260,1590 5240,1610 v1(5200,1610)
+5: B1.14 B2.14 C1.1 C2.1 C3.1 C4.1 C5.1 C6.1 C7.1 C8.1 C9.1 C10.1 C11.1 C12.1 C13.1 C14.1 C15.1 C16.1 H1.1 H2.1 H3.1 H4.1 IC1.10 IC1.18 IC1.28 IC2.10 IC2.18 IC2.28 IC3.10 IC3.18 IC3.28 IC4.10 IC4.18 IC4.28 J1.1 J2.1 J5.1 P1.1 P2.1 P3.1 P4.1 R1.1 R2.1 R3.1 R4.1 R5.2 R6.2 R7.2 R8.2 R9.2 R10.2 R11.2 R12.2 R13.2 R14.2 R16.2 R17.2 R18.2 R19.2 R20.2 R21.2 R22.2 R23.2 R24.2 R25.2 R32.2 R33.2 R34.2 R41.1 R42.1 R43.1 R44.1 R45.1 R46.1 R47.1 R48.1 TP2.1 U1.20 U2.14 U3.4 U3.20 WiFi1.62 WiFi1.63 WiFi1.64 | length 10531.6
  Top Layer w10: IC4.10@1591.26,1653.15 1591.26,1734.14 1597.12,1740 v1(1660,1740) ; IC4.28@1685.75,1986.85 1685.75,1770.82 1660,1745.07 v1(1660,1740) ; IC4.18@1836.85,1741.26 1836.22,1740.63 1660.63,1740.63 v1(1660,1740) ; U1.20@1879.76,2875.16 1879.76,2960.29 1885.62,2966.15 1963.85,2966.15 v1(1970,2960) ; v1(1880,1520) R41.1@1880,1431.5 R42.1@1980,1431.5 R43.1@2080,1431.5 R44.1@2180,1431.5 R45.1@2280,1431.5 R46.1@2380,1431.5 R47.1@2480,1431.5 R48.1@2580,1431.5 ; U2.14@2665.67,2886.77 2756.77,2886.77 2770,2900 v1(2770,2960) ; IC2.10@3908.5,1790 3908.5,1858.5 3922.35,1872.35 3942.35,1872.35 v1(3950,1880) 3950.94,1879.06 4000,1879.06 ; IC2.28@4002.99,2123.7 4002.99,1882.05 4000,1879.06 ; IC2.18@4154.09,1878.11 4153.15,1879.06 4000,1879.06 ; IC3.10@4191.26,893.15 4191.26,951.26 v1(4220,980) 4220.63,980.63 4436.22,980.63 IC3.18@4436.85,981.26 ; IC3.28@4285.75,1226.85 4285.75,1345.75 v1(4320,1380) ; IC1.10@4351.26,3133.15 4351.26,3211.26 v1(4370,3230) 4450,3230 ; U3.4@4352.2,609.57 4430.43,609.57 4470,570 4470,510 4497.93,482.07 4497.93,481.61 4520,481.61 ; B2.14@4364.33,1643.23 4320.3,1643.23 4314.44,1649.09 4314.44,1831.3 4320,1836.86 4320,1864.14 4325.86,1870 4370.19,1870 ; B1.14@4364.33,1933.23 4364.33,1875.86 4370.19,1870 ; v1(4420,1870) 4370.19,1870 ; IC1.28@4445.75,3466.85 4445.75,3234.25 4450,3230 ; v1(4520,390) 4520,481.61 ; IC1.18@4596.85,3221.26 4488.42,3221.26 4479.68,3230 4450,3230 ; U3.20@4627.8,481.61 4520,481.61 ; R32.2@4690,1438.5 4791.5,1438.5 P3.1@4800,1430 ; P1.1@4731.36,3650 4894.14,3650 4900,3644.14 R2.1@4900,3521.5 R1.1@4960,3521.5 5188.5,3521.5 5205,3505 J1.1@5205,3437.8 ; R33.2@4911.48,1232.97 4911.48,1237.78 4913.7,1240 5020,1240 5080,1180 v1(5080,1130) ; R4.1@4970,2741.5 5000,2741.5 ; v1(5000,2830) 5000,2741.5 ; R3.1@5030,2741.5 5000,2741.5 ; J2.1@5205,2637.8 5372.2,2637.8 v1(5410,2600)
  Bottom Layer w10: H2.1@800,3300 800,3362.65 805.86,3368.5 R23.2@1150,3368.5 R22.2@1250,3368.5 R21.2@1350,3368.5 R20.2@1450,3368.5 R19.2@1550,3368.5 R18.2@1650,3368.5 R17.2@1750,3368.5 R16.2@1850,3368.5 R5.2@2000,3368.5 R11.2@2120,3368.5 R6.2@2280,3368.5 R13.2@2400,3368.5 R7.2@2560,3368.5 R12.2@2680,3368.5 R8.2@2840,3368.5 R10.2@2960,3368.5 R9.2@3150,3368.5 R24.2@3390,3368.5 R25.2@3510,3368.5 ; v1(1660,1740) 1585.11,1740 1579.25,1745.86 1579.25,1809.25 C13.1@1568.5,1820 1570,1821.5 1570,1924.14 1575.86,1930 1742.99,1930 1751.5,1921.5 C16.1@1751.5,1880 1752.99,1878.5 C14.1@1752.99,1820 ; v1(3880,3450) 3880,3374.36 3885.86,3368.5 R14.2@3980,3368.5 ; C8.1@3890,2011.5 C8.1@3898.5,2020 3898.5,1891.5 3910,1880 v1(3950,1880) 4070,1880 4081.5,1891.5 C6.1@4081.5,2020 ; C12.1@4178.5,1130 C9.1@4178.5,1060 4178.5,1021.5 v1(4220,980) 4340,980 4350.75,990.75 4350.75,1049.25 C10.1@4361.5,1060 4360,1061.5 C11.1@4360,1130 ; C1.1@4328.5,3370 4328.5,3228.2 4334.36,3222.35 4362.35,3222.35 v1(4370,3230) 4500,3230 4511.5,3241.5 C3.1@4511.5,3370
CPU_D0: H1.2 H2.2 H3.2 H4.2 IC1.30 IC2.30 IC3.30 IC4.30 U1.2 | length 11981.4
  Top Layer w10: H3.2@400,2000 704.14,2000 710,2005.86 710,2060 750,2100 870,2100 900,2070 H4.2@900,2000 v1(1100,2000) 1284.14,2000 1290,2005.86 1290,2074.14 1295.86,2080 1616.9,2080 1622.76,2074.14 IC4.30@1622.76,1986.85 ; H1.2@400,3300 694.14,3300 700,3305.86 700,3340 730,3370 870,3370 900,3340 H2.2@900,3300 1070,3300 1080,3290 1080,3005.86 1085.86,3000 v1(1270,3000) 1310,3000 1460.43,2849.57 U1.2@1600.24,2849.57 ; IC2.30@3940,2123.7 3940,2310 3910,2340 v1(3835,2340) 3660,2340 3630,2310 3630,1745.86 3650,1725.86 3650,1450.86 3655.86,1445 4000,1445 3995,1440 3995,1305.86 4000.86,1300 4216.9,1300 4222.76,1294.14 IC3.30@4222.76,1226.85 ; v1(4370,3570) 4376.38,3563.62 4376.38,3473.23 IC1.30@4382.76,3466.85
  Bottom Layer w10: v1(1100,2000) 1100,2994.14 1105.86,3000 v1(1270,3000) 1435,3000 1440.86,2994.14 1440.86,2330.86 1446.72,2325 3104.14,2325 3110,2319.14 3110,1865.86 3115.86,1860 3287.28,1860 3312.28,1835 3603.79,1835 3650,1788.79 v1(3650,1720) ; v1(3835,2340) 3835,2350.39 3870,2385.39 3870,2794.14 3875.86,2800 4084.14,2800 4090,2805.86 4090,3170 4100,3180 4290,3180 4297.68,3187.68 4297.68,3460 4364.14,3460 4370,3465.86 v1(4370,3570)
CPU_D1: H1.4 H2.4 H3.4 H4.4 IC1.31 IC2.31 IC3.31 IC4.31 U1.4 | length 11816.9
  Top Layer w10: H3.4@400,1900 450,1850 850,1850 H4.4@900,1900 v1(1100,1900) 1299.14,1900 1305,1905.86 1305,2054.14 1310.86,2060 1585.4,2060 1591.26,2054.14 IC4.31@1591.26,1986.85 ; H1.4@400,3200 710,3200 760,3150 880,3150 890.43,3160.43 890.43,3190.43 H2.4@900,3200 909.57,3190.43 930.42,3190.43 930.86,3190 1044.14,3190 1050,3184.14 1050,2905.86 1055.86,2900 v1(1270,2900) 1310,2900 1411.61,2798.39 U1.4@1600.24,2798.39 ; v1(3580,2280) v1(3580,1720) 3580,1678.62 3585.86,1672.77 3629.14,1672.77 3635,1666.91 3635,1435.86 3640.86,1430 3980,1430 3980,1285.86 3985.86,1280 4182.52,1280 4191.26,1271.26 IC3.31@4191.26,1226.85 ; v1(3690,2280) 3904.14,2280 3910,2274.14 3910,2125.2 IC2.31@3908.5,2123.7 ; v1(4300,3560) 4351.26,3508.74 IC1.31@4351.26,3466.85 IC1.31@4344.45,3473.66
  Bottom Layer w10: v1(1100,1900) 1154.14,1900 1160,1905.86 1160,2029.14 1154.14,2035 1125.86,2035 1115,2045.86 1115,2894.14 1120.86,2900 v1(1270,2900) 1410,2900 1425.86,2884.14 1425.86,2315.86 1431.72,2310 3089.14,2310 3095,2304.14 3095,1850.86 3100.86,1845 3281.07,1845 3306.07,1820 3560,1820 3580,1800 v1(3580,1720) ; v1(3580,2280) v1(3690,2280) 3690,2290.82 3711.8,2312.62 3711.8,2381.8 3720,2390 3844.14,2390 3850,2395.86 3850,2795.36 3869.64,2815 4069.14,2815 4075,2820.86 4075,3183.79 4086.21,3195 4274.14,3195 4280,3200.86 4280,3510 4292.35,3522.35 4292.35,3552.35 v1(4300,3560)
CPU_D2: H1.6 H2.6 H3.6 H4.6 IC1.32 IC2.32 IC3.32 IC4.32 U1.6 | length 11780.6
  Top Layer w10: H3.6@400,1800 450,1750 850,1750 H4.6@900,1800 v1(1100,1800) 1314.14,1800 1320,1805.86 1320,1980 1330,1990 1556.61,1990 IC4.32@1559.76,1986.85 IC4.32@1560,1987.09 ; H1.6@400,3100 450,3050 850,3050 909.57,3109.57 930.42,3109.57 930.86,3110 1024.14,3110 1030,3104.14 1030,2810 1040,2800 v1(1270,2800) 1330,2800 1382.8,2747.2 U1.6@1600.24,2747.2 ; v1(3510,2210) v1(3510,1720) 3510,1665.86 3520.86,1655 3614.14,1655 3620,1649.14 3620,1415.86 3625.86,1410 3960,1410 3962.5,1407.5 3962.5,1230 ; v1(3690,2210) 3871.15,2210 3877.01,2204.14 IC2.32@3877.01,2123.7 ; IC3.32@4159.76,1226.85 4051.61,1226.85 ; v1(4240,3520) 4293.15,3466.85 IC1.32@4319.76,3466.85 ; 3962.5,1230 3962.5,1191.09 3968.36,1185.24 4010,1185.24 4051.61,1226.85 ; 3962.5,1230 3965.65,1226.85 4051.61,1226.85
  Bottom Layer w10: v1(1100,1800) 1150,1800 1175,1825 1175,2049.57 1169.14,2055.43 1132.5,2055.43 1131.04,2056.89 1131.04,2060.25 1130,2061.29 1130,2794.14 1135.86,2800 v1(1270,2800) 1400,2800 1410.86,2789.14 1410.86,2300.86 1416.72,2295 3074.14,2295 3080,2289.14 3080,1835.86 3085.86,1830 3274.85,1830 3299.85,1805 3501.36,1805 3510,1796.36 v1(3510,1720) ; v1(3690,2210) v1(3510,2210) 3510,2334.14 3525.86,2350 3612.43,2350 3672.43,2410 3829.14,2410 3835,2415.86 3835,2801.57 3863.43,2830 4054.14,2830 4060,2835.86 4060,3190 4080,3210 4259.14,3210 4265,3215.86 4265,3488.43 4240,3513.43 v1(4240,3520)
CPU_D3: H1.8 H2.8 H3.8 H4.8 IC1.1 IC2.1 IC3.1 IC4.1 U1.8 | length 11884.9
  Top Layer w10: H3.8@400,1700 450,1650 850,1650 H4.8@900,1700 v1(1100,1700) 1329.14,1700 1335,1705.86 1335,1924.38 1340.86,1930.24 IC4.1@1503.15,1930.24 ; H1.8@400,3000 450,2950 850,2950 H2.8@900,3000 1004.14,3000 1010,2994.14 1010,2705.86 1015.86,2700 v1(1270,2700) 1410,2700 1413.98,2696.02 U1.8@1600.24,2696.02 ; v1(3450,2080) 3450,1745.86 3447.65,1743.51 3447.65,1727.65 v1(3440,1720) 3440,1645.86 3445.86,1640 3599.14,1640 3605,1634.14 3605,1400.86 3610.86,1395 3941.64,1395 3947.5,1389.14 3947.5,1176.09 3953.36,1170.24 IC3.1@4103.15,1170.24 ; v1(3690,2140) 3814.54,2140 3820.39,2134.14 IC2.1@3820.39,2067.09 ; v1(4180,3460) 4180,3415.98 4185.86,3410.12 IC1.1@4262.8,3410.12
  Bottom Layer w10: v1(1100,1700) 1170,1700 1190,1720 1190,2065 1184.14,2070.86 1150.86,2070.86 1145,2076.72 1145,2694.14 1150.86,2700 v1(1270,2700) 1380,2700 1395.86,2684.14 1395.86,2285.86 1401.72,2280 3059.14,2280 3065,2274.14 3065,1820.86 3070.86,1815 3268.64,1815 3293.64,1790 3370.36,1790 3440,1720.36 v1(3440,1720) ; v1(3690,2140) 3560,2140 3560,1926.32 3554.14,1920.46 3455.86,1920.46 3450,1926.32 v1(3450,2080) 3450,2364.75 3455.86,2370.61 3611.82,2370.61 3671.21,2430 3814.14,2430 3820,2435.86 3820,2820 3845,2845 4034.14,2845 4045,2855.86 4045,3205 4065,3225 4244.14,3225 4250,3230.86 4250,3450 4240,3460 v1(4180,3460)
CPU_D4: H1.10 H2.10 H3.10 H4.10 IC1.2 IC2.2 IC3.2 IC4.2 U1.11 | length 12527.5
  Top Layer w10: H3.10@390.75,1609.25 H3.10@400,1600 443.54,1556.46 856.46,1556.46 H4.10@893.83,1593.83 ; H1.10@400,2900 400,2890 433.54,2856.46 866.46,2856.46 900,2890 H2.10@900,2900 900.61,2899.39 984.14,2899.39 990,2893.54 990,2605.86 995.86,2600 v1(1270,2600) 1350,2600 1390,2560 1390,2515.86 1395.86,2510 1999.14,2510 2005,2515.86 2005,2638.98 1999.14,2644.84 U1.11@1879.76,2644.84 ; H4.10@900,1600 v1(1100,1600) 1344.14,1600 1350,1605.86 1350,1884.14 1364.6,1898.74 IC4.2@1503.15,1898.74 ; v1(3390,2000) 3390,1891.17 3370,1871.17 v1(3370,1720) 3370,1630.86 3375.86,1625 3579.14,1625 3590,1614.14 3590,1385.86 3595.86,1380 3928.54,1380 3932.5,1376.04 3932.5,1144.6 3938.36,1138.74 IC3.2@4103.15,1138.74 ; v1(3690,2070) 3744.14,2070 3750,2064.14 3750,2050 3764.41,2035.59 IC2.2@3820.39,2035.59 ; v1(4130,3400) 4140,3400 4160.63,3379.37 4262.52,3379.37 IC1.2@4263.15,3378.74
  Bottom Layer w10: v1(1100,1600) 1204.14,1600 1210,1605.86 1210,2084.14 1204.14,2090 1165.86,2090 1160,2095.86 1160,2594.14 1165.86,2600 v1(1270,2600) 1350.15,2600 1380,2570.15 1380,2270.86 1385.86,2265 3044.14,2265 3050,2259.14 3050,1805.86 3055.86,1800 3262.43,1800 3287.43,1775 3364.14,1775 3370,1769.14 v1(3370,1720) ; v1(3690,2070) 3585.86,2070 3580,2064.14 3580,1920 3580.4,1919.6 3580.4,1911.32 3574.54,1905.46 3395.86,1905.46 3390,1911.32 3390,2328.79 3446.82,2385.61 3605.61,2385.61 3665,2445 3799.14,2445 3805,2450.86 3805,2826.21 3838.79,2860 4019.14,2860 4030,2870.86 4030,3211.21 4058.79,3240 4229.14,3240 4235,3245.86 4235,3374.14 4229.14,3380 4160.82,3380 4140.82,3400 v1(4130,3400)
CPU_D5: H1.12 H2.12 H3.12 H4.12 IC1.3 IC2.3 IC3.3 IC4.3 U1.13 | length 12411.8
  Top Layer w10: H3.12@400,1500 445,1455 855,1455 H4.12@900,1500 v1(1100,1500) 1360,1500 1370,1510 1370,1854.14 1383.1,1867.24 IC4.3@1503.15,1867.24 ; H1.12@400,2800 405,2800 450,2755 860,2755 900,2795 H2.12@900,2800 964.14,2800 970,2794.14 970,2510 980,2500 v1(1270,2500) 1275,2495 2005.36,2495 2020,2509.64 2020,2690 2013.98,2696.02 U1.13@1879.76,2696.02 ; v1(3300,2070) v1(3300,1720) 3300,1615.86 3305.86,1610 3564.14,1610 3575,1599.14 3575,1365.86 3580.86,1360 3917.5,1360 3917.5,1113.1 3923.36,1107.24 IC3.3@4103.15,1107.24 ; v1(3690,2000) 3692.05,2002.05 3818.35,2002.05 IC2.3@3820.39,2004.09 ; v1(4090,3340) 4093.62,3343.62 4259.53,3343.62 IC1.3@4263.15,3347.24
  Bottom Layer w10: v1(1100,1500) 1224.14,1500 1230,1505.86 1230,2099.14 1224.14,2105 1180.86,2105 1175,2110.86 1175,2494.14 1180.86,2500 v1(1270,2500) 1276.57,2506.57 1354.14,2506.57 1360,2500.71 1360,2255.86 1365.86,2250 3029.14,2250 3035,2244.14 3035,1790.86 3040.86,1785 3256.21,1785 3274.28,1766.93 3274.28,1750.85 3300,1725.13 v1(3300,1720) ; v1(3690,2000) 3610.86,2000 3605,1994.14 3605,1896.32 3599.14,1890.46 3320.46,1890.46 3305.92,1905 3305.86,1905 3300,1910.86 v1(3300,2070) 3370,2140 3370,2330 3440.61,2400.61 3599.39,2400.61 3658.79,2460 3784.14,2460 3790,2465.86 3790,2840 3825,2875 4009.14,2875 4015,2880.86 4015,3217.43 4048.79,3251.21 4048.79,3298.79 v1(4090,3340)
CPU_D6: H1.14 H2.14 H3.14 H4.14 IC1.4 IC2.4 IC3.4 IC4.4 U1.15 | length 13769.4
  Top Layer w10: H4.14@900,1400 v1(1100,1400) 1379.14,1400 1385,1405.86 1385,1829.89 1390.86,1835.75 IC4.4@1503.15,1835.75 ; H2.14@900,2700 944.14,2700 950,2694.14 950,2405.86 955.86,2400 v1(1270,2400) 1360,2400 1440,2480 2025,2480 2035,2490 2035,2741.35 2029.14,2747.2 U1.15@1879.76,2747.2 ; v1(3230,2000) v1(3230,1720) 3230,1600.86 3235.86,1595 3549.14,1595 3560,1584.14 3560,1345.86 3565.86,1340 3897.93,1340 3897.93,1092.07 3914.25,1075.75 IC3.4@4103.15,1075.75 ; v1(3690,1930) 3700,1930 3742.6,1972.6 IC2.4@3820.39,1972.6 ; v1(3960,3090) 3964.14,3090 3980,3074.14 3980,3061.21 4000.61,3040.61 4079.39,3040.61 4090,3051.21 4090,3294.14 4090.86,3295 4165,3295 4185.75,3315.75 IC1.4@4263.15,3315.75
  Bottom Layer w10: H3.14@400,1400 704.14,1400 710,1394.14 710,1205.86 715.86,1200 984.14,1200 990,1205.86 990,1350 945,1395 905,1395 H4.14@900,1400 ; H1.14@400,2700 690,2700 700,2690 700,2505.86 705.86,2500 974.14,2500 980,2505.86 980,2694.14 974.14,2700 H2.14@900,2700 ; v1(1100,1400) 1230,1400 1245,1415 1245,2114.14 1239.14,2120 1195.86,2120 1190,2125.86 1190,2394.14 1195.86,2400 v1(1270,2400) 1345,2400 1345,2240.86 1350.86,2235 3014.14,2235 3020,2229.14 3020,1775.86 3025.86,1770 3230,1770 v1(3230,1720) ; v1(3690,1930) 3620,1930 3620,1880.86 3614.14,1875 3314.71,1875 3299.71,1890 3235.86,1890 3230,1895.86 v1(3230,2000) 3230,2104.14 3235.86,2110 3318.79,2110 3355,2146.21 3355,2336.21 3434.39,2415.61 3593.18,2415.61 3652.57,2475 3769.14,2475 3775,2480.86 3775,2846.21 3818.79,2890 3994.14,2890 4000,2895.86 4000,3076.49 3994.14,3082.35 3967.65,3082.35 v1(3960,3090)
CPU_D7: H1.16 H2.16 H3.16 H4.16 IC1.5 IC2.5 IC3.5 IC4.5 U1.17 | length 13366.5
  Top Layer w10: H3.16@400,1300 704.14,1300 710,1294.14 710,1205.86 715.86,1200 894.14,1200 900,1205.86 H4.16@900,1300 v1(1100,1300) 1394.14,1300 1400,1305.86 1400,1798.39 1405.86,1804.25 IC4.5@1503.15,1804.25 ; H1.16@400,2600 694.14,2600 700,2594.14 700,2505.86 705.86,2500 894.14,2500 900,2505.86 ; H2.16@900,2600 900,2505.86 ; U1.17@1879.76,2798.39 2035.76,2798.39 2050,2784.14 2050,2470 2045,2465 1450,2465 1370,2385 1370,2300 v1(1270,2300) 900,2300 900,2505.86 ; v1(3160,2140) v1(3160,1720) 3160,1585.86 3165.86,1580 3534.14,1580 3540,1574.14 3540,1330 3550,1320 3877.07,1320 3882.93,1314.14 3882.93,1067.07 3905.86,1044.14 3992.43,1044.14 3992.54,1044.25 4001.61,1044.25 IC3.5@4103.15,1044.25 ; v1(3680,1850) 3740,1910 3740,1930 3751.1,1941.1 IC2.5@3820.39,1941.1 ; v1(3930,3020) 4080,3020 4110,3050 4110,3274.14 4115.86,3280 4258.9,3280 IC1.5@4263.15,3284.25
  Bottom Layer w10: v1(1100,1300) 1254.14,1300 1260,1305.86 1260,2129.14 1254.14,2135 1210.86,2135 1205,2140.86 1205,2300 v1(1270,2300) 1330,2300 1330,2225.86 1335.86,2220 2999.14,2220 3005,2214.14 3005,1725 3004.14,1724.14 3009.14,1719.14 3159.14,1719.14 v1(3160,1720) ; v1(3680,1850) 3318.49,1850 3293.49,1875 3165.86,1875 3160,1880.86 v1(3160,2140) 3320,2140 3340,2160 3340,2344.14 3345.86,2350 3347.57,2350 3429.39,2431.82 3588.18,2431.82 3646.36,2490 3754.14,2490 3760,2495.86 3760,2854.14 3765.86,2860 3767.57,2860 3812.57,2905 3979.14,2905 3985,2910.86 3985,3014.14 3979.14,3020 v1(3930,3020)
CPU_Reset: H1.11 H2.11 H3.11 H4.11 IC1.26 IC2.26 IC3.26 IC4.26 LED5.1 | length 16204.4
  Top Layer w10: H1.11@300,2800 350,2850 350,3144.14 355.86,3150 565.3,3150 ; v1(590,3390) 590,3590 650,3650 3245.86,3650 ; IC4.26@1748.74,1986.85 1748.74,2064.14 1764.6,2080 v1(2010,2080) ; LED5.1@3150,3368.5 3234.14,3368.5 3240,3374.36 3240,3644.14 3245.86,3650 ; v1(3760,3650) 3245.86,3650 ; IC2.26@4065.98,2123.7 4065.98,2234.14 4071.84,2240 v1(4130,2240) ; IC3.26@4348.74,1226.85 4348.74,1278.74 4410,1340 v1(4460,1340) ; IC1.26@4508.74,3466.85 4508.74,3544.14 4514.6,3550 4579.18,3550 4599.18,3530 v1(4610,3530)